# EAGLE board SparkFun_Qwiic_Micro_SAMD21E-Panel (EAGLE 9.4.2), part 1 of 5
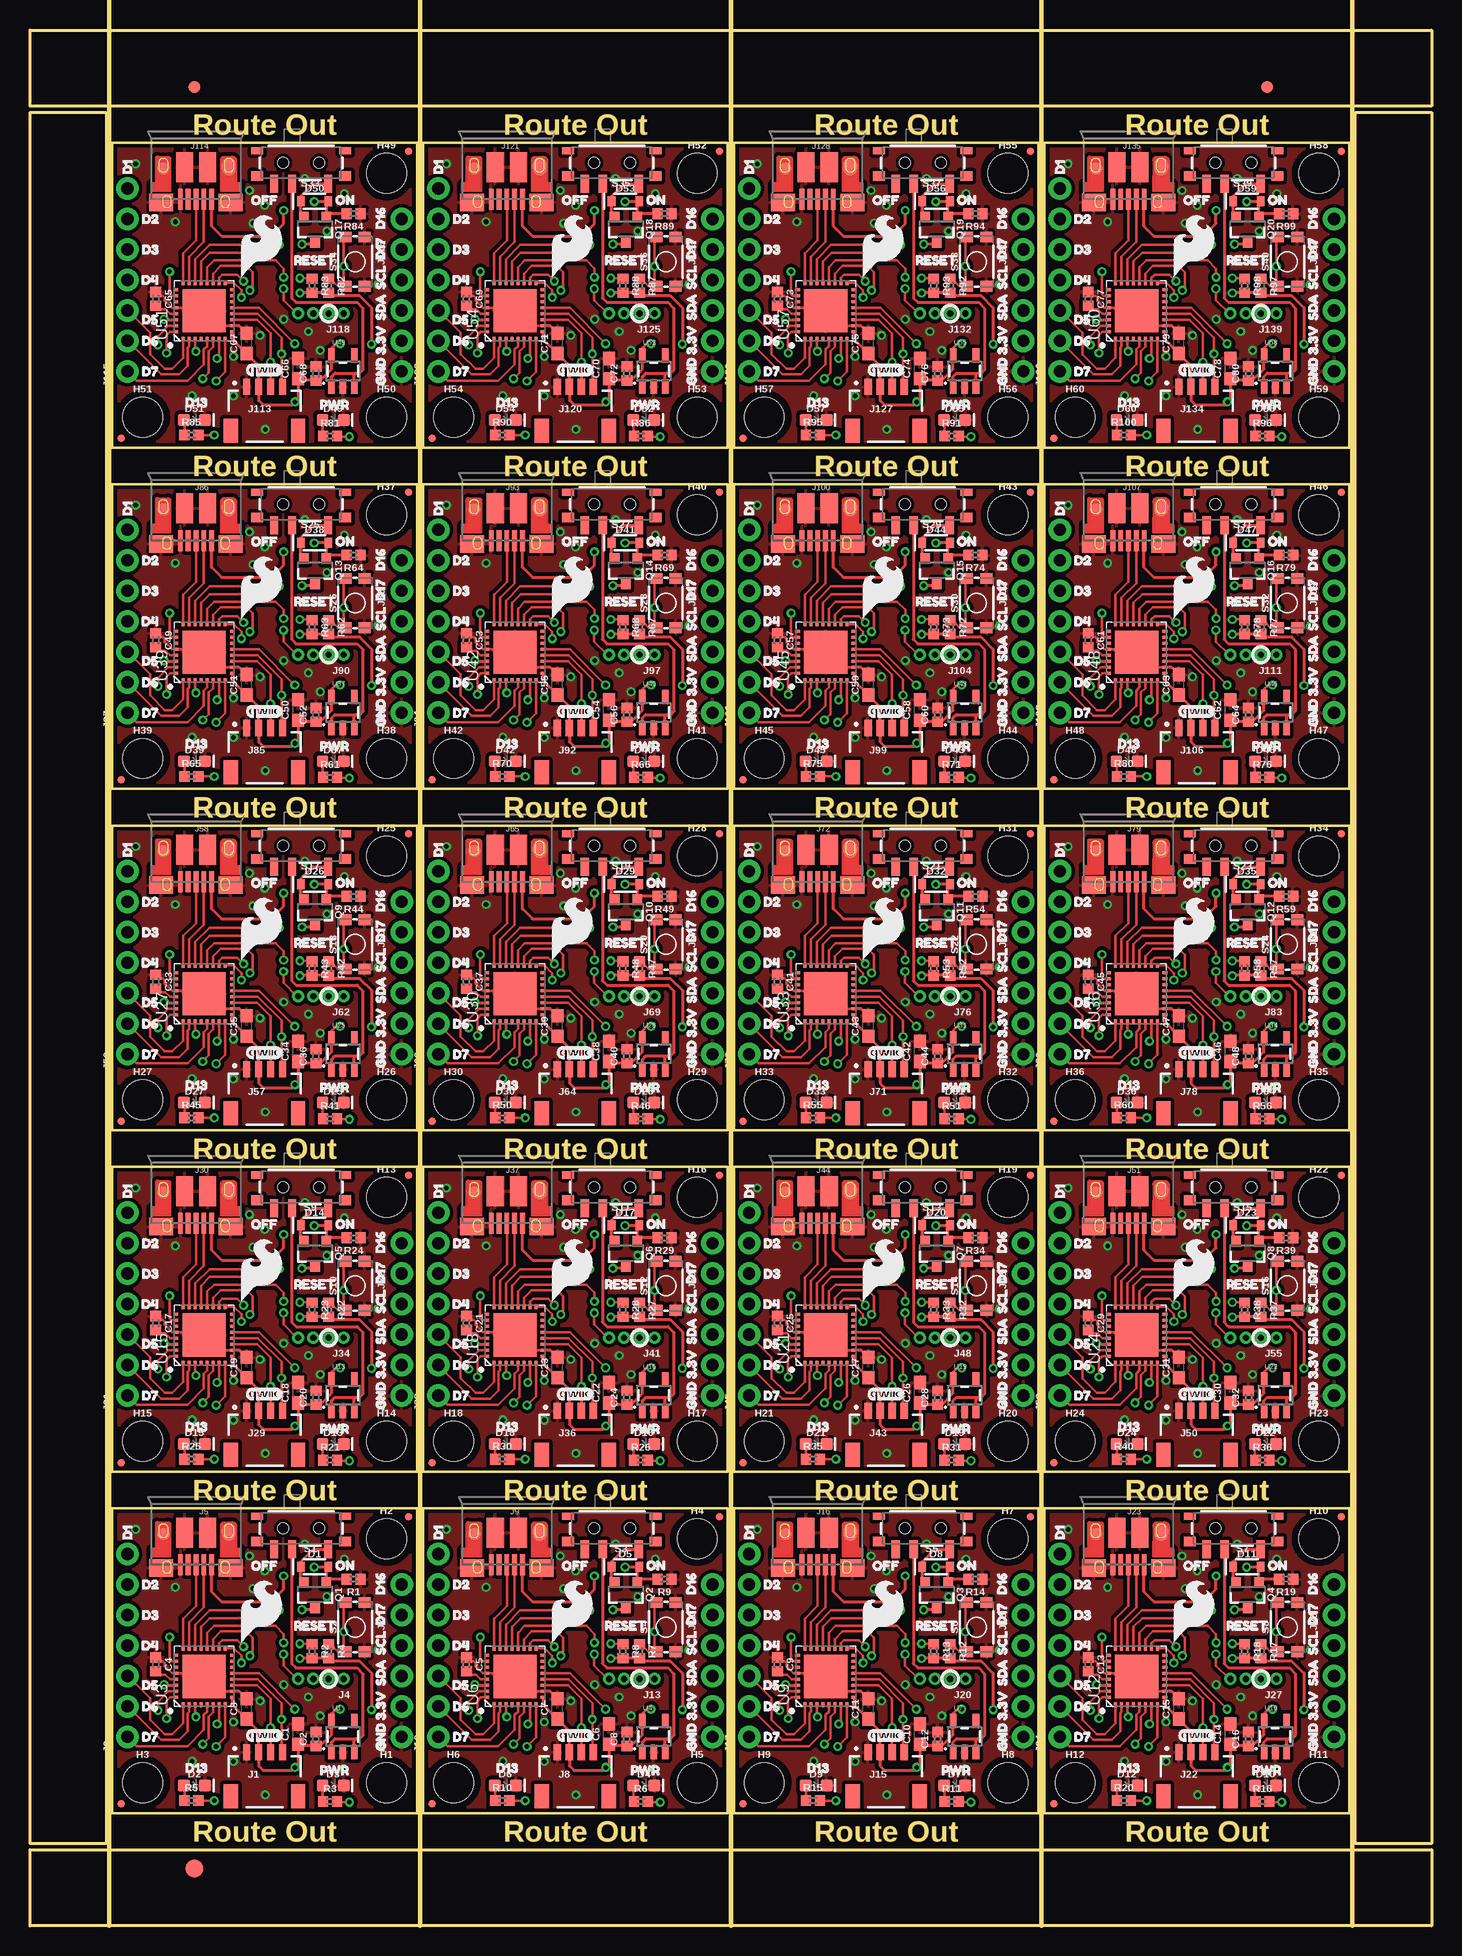
[diagram p0: board, top side]
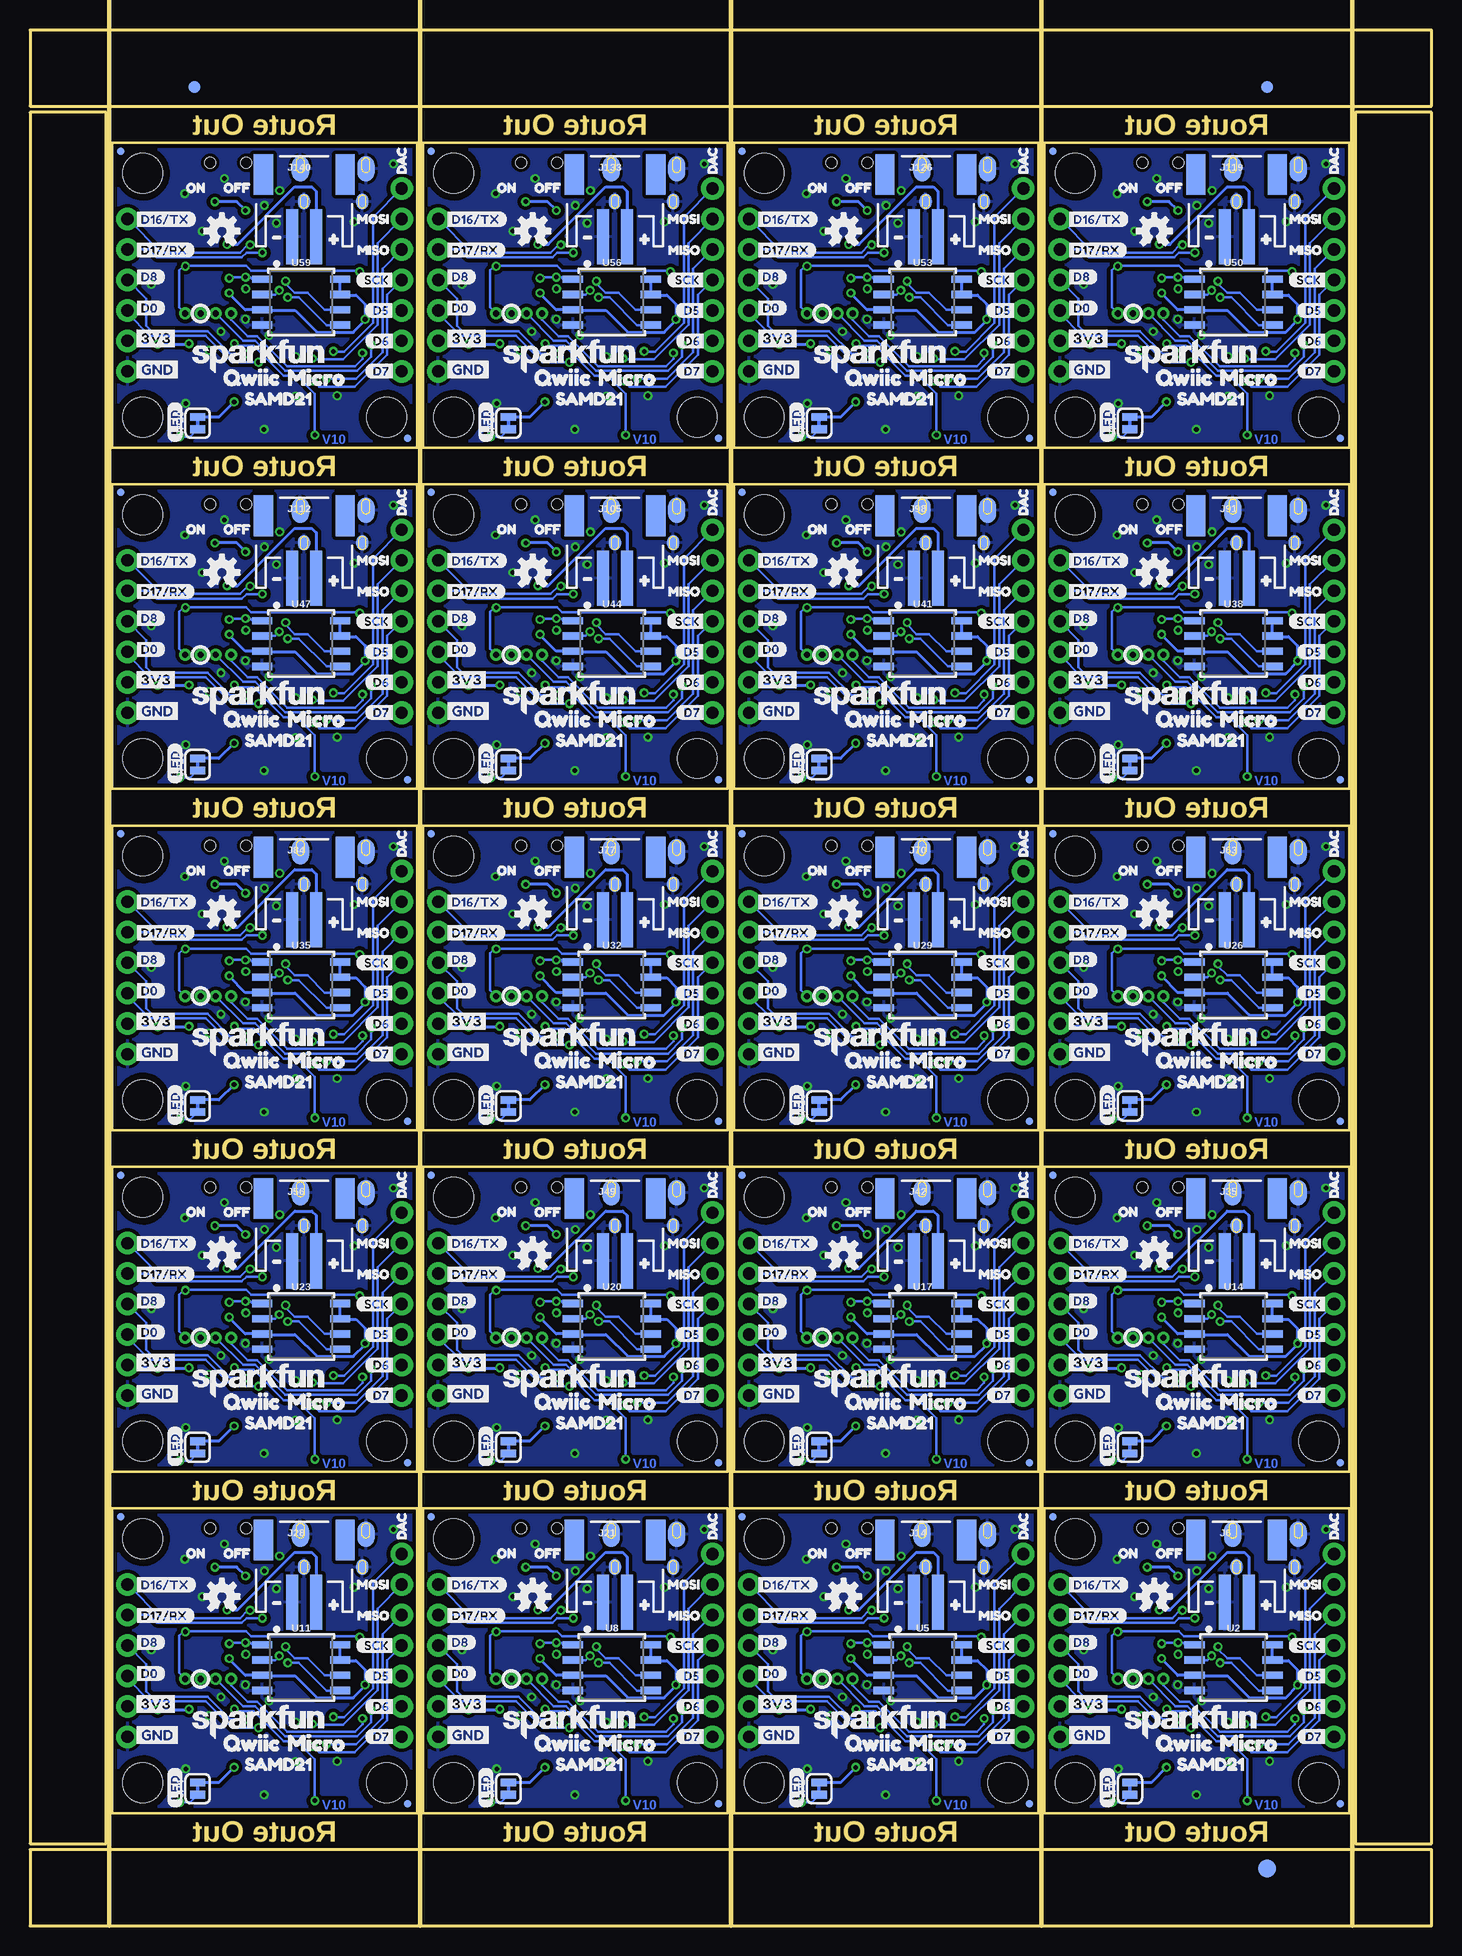
[diagram p1: board, bottom side, seen from below]

Size 116.84 x 157.99 mm. Coordinates in mm from the lower left corner, seen from the top.
Outline: 6.86,9.4 32.26,9.4 32.26,34.8 6.86,34.8 6.86,9.4
Outline: 32.77,9.4 58.17,9.4 58.17,34.8 32.77,34.8 32.77,9.4
Outline: 58.67,9.4 84.07,9.4 84.07,34.8 58.67,34.8 58.67,9.4
Outline: 84.58,9.4 109.98,9.4 109.98,34.8 84.58,34.8 84.58,9.4
Outline: 6.86,37.85 32.26,37.85 32.26,63.25 6.86,63.25 6.86,37.85
Outline: 32.77,37.85 58.17,37.85 58.17,63.25 32.77,63.25 32.77,37.85
Outline: 58.67,37.85 84.07,37.85 84.07,63.25 58.67,63.25 58.67,37.85
Outline: 84.58,37.85 109.98,37.85 109.98,63.25 84.58,63.25 84.58,37.85
Outline: 6.86,66.29 32.26,66.29 32.26,91.69 6.86,91.69 6.86,66.29
Outline: 32.77,66.29 58.17,66.29 58.17,91.69 32.77,91.69 32.77,66.29
Outline: 58.67,66.29 84.07,66.29 84.07,91.69 58.67,91.69 58.67,66.29
Outline: 84.58,66.29 109.98,66.29 109.98,91.69 84.58,91.69 84.58,66.29
Outline: 6.86,94.74 32.26,94.74 32.26,120.14 6.86,120.14 6.86,94.74
Outline: 32.77,94.74 58.17,94.74 58.17,120.14 32.77,120.14 32.77,94.74
Outline: 58.67,94.74 84.07,94.74 84.07,120.14 58.67,120.14 58.67,94.74
Outline: 84.58,94.74 109.98,94.74 109.98,120.14 84.58,120.14 84.58,94.74
Outline: 6.86,123.19 32.26,123.19 32.26,148.59 6.86,148.59 6.86,123.19
Outline: 32.77,123.19 58.17,123.19 58.17,148.59 32.77,148.59 32.77,123.19
Outline: 58.67,123.19 84.07,123.19 84.07,148.59 58.67,148.59 58.67,123.19
Outline: 84.58,123.19 109.98,123.19 109.98,148.59 84.58,148.59 84.58,123.19
Outline: 0,6.35 116.84,6.35 116.84,0 0,0 0,6.35
Outline: 110.49,151.13 116.84,151.13 116.84,6.86 110.49,6.86 110.49,151.13
Outline: 0,157.99 116.84,157.99 116.84,151.64 0,151.64 0,157.99
Outline: 0,151.13 6.35,151.13 6.35,6.86 0,6.86 0,151.13
Copper layers (1*16): Top 0.035mm / dielectric 1.5mm / Bottom 0.035mm
Design rules "SparkFun-2-layer-TIGHT": minimum track width 7mil, minimum drill 15mil, track to track 7mil, track to pad 7mil, pad to pad 7mil, via to via 7mil, smd to smd 7mil, copper to edge 7mil, drill to drill 7mil, minimum pad ring 7mil, minimum via ring 7mil, stop-mask expansion 4mil, vias tented up to drill 25mil, thermal gap 10mil
Milling: 5 lines

## Footprints (pad centres in the part's own frame; a part is rotated, then mirrored left to right if it is on the bottom)
0603 = smd 1.1 x 1: 1 -0.85,0; 2 0.85,0
0402 = smd 0.85 x 0.9: 1 -0.58,0; 2 0.58,0
SOD-323 = smd 0.63 x 0.83: A 1.15,0; C -1.15,0
LED-0603 = smd 1 x 1: A -0.877,0; C 0.877,0
FIDUCIAL-1X2 = smd 1 x 1: 1 0,0
FIDUCIAL-1.5X3 = smd 1.5 x 1.5: 1 0,0
FIDUCIAL-MICRO = smd 0.635 x 0.635: 1 0,0
STAND-OFF = hole 3.302: 0,0
JST04_1MM_RA = smd 0.6 x 1.35: 1 -1.5,0; 2 -0.5,0; 3 0.5,0; 4 1.5,0 | smd 1.2 x 2: NC1 2.8,-3.675; NC2 -2.8,-3.675
1X04_NO_SILK = drill 1.016 pad 1.88: 1 0,0; 2 2.54,0; 3 5.08,0; 4 7.62,0
1X07_NO_SILK = drill 1.016 pad 1.88: 1 0,0; 2 2.54,0; 3 5.08,0; 4 7.62,0; 5 10.16,0; 6 12.7,0; 7 15.24,0
1X04_1.27MM_NO_SILK = drill 0.508 pad 1: 1 0,0; 2 1.27,0; 3 2.54,0; 4 3.81,0
USB-MICROB-PTH-MILL = smd 0.4 x 1.75: D+ 0,0; D- -0.65,0; GND 1.3,0; ID 0.65,0; VBUS -1.3,0 | smd 2 x 1.46: SHIELD -2.9,0.275; SHIELD2 2.9,0.275 | smd 1.425 x 2.5: SHIELD3 -0.963,-2.675; SHIELD4 0.963,-2.675 | smd 1.4 x 2.1 bottom: SHIELD5 -2.731,-2.531; SHIELD7 2.729,-2.531 | smd 1 x 1: SHIELD6 2.7,-2.575 | smd 1.1 x 1.5: SHIELD8 -2.731,-2.731 | smd 1 x 1.3 bottom: SHIELD9 -2.43,0.195; SHIELD10 2.43,0.195
JST-2-SMD = smd 1 x 4.6: 1 -1,-3.7; 2 1,-3.7 | smd 1.6 x 3.4: NC1 -3.4,1.5; NC2 3.4,1.5
1X02_NO_SILK = drill 1.016 pad 1.88: 1 0,0; 2 2.54,0
SMT-JUMPER_2_NC_TRACE_SILK = smd 0.635 x 1.27: 1 -0.508,0; 2 0.508,0
SOT23-3 = smd 0.8 x 0.9: 1 -0.95,-1; 2 0.95,-1; 3 0,1.1
SWITCH_SPST_SMD_A = smd 0.7 x 1.5: 1 -2.25,-1.75; 2 -0.75,-1.75; 3 2.25,-1.75 | smd 1 x 0.6: GND1 -3.65,1; GND3 3.65,1 | smd 1 x 0.8: GND2 -3.65,-1.1; GND4 3.65,-1.1 | hole 0.9: -1.5,0; 1.5,0
TACTILE_SWITCH_SMD_4.6X2.8MM = smd 0.9 x 1: 1 -2.05,-0.8; 2 2.05,-0.8; 3 2.05,0.8; 4 -2.05,0.8
TP_15TH = drill 0.381 pad 0.61: P$1 0,0
SOT23-5 = smd 0.55 x 1.2: 1 -0.95,-1.3; 2 0,-1.3; 3 0.95,-1.3; 4 0.95,1.3; 5 -0.95,1.3
SOIC-8 = smd 0.61 x 1.702: 1 -1.905,-3.251; 2 -0.635,-3.251; 3 0.635,-3.251; 4 1.905,-3.251; 5 1.905,3.251; 6 0.635,3.251; 7 -0.635,3.251; 8 -1.905,3.251
QFN-32_SAMD = smd 0.25 x 0.4: GND 0.21,2.31; GNDANA -1.29,-2.39; PA08 -0.79,-2.39; PA09 -0.29,-2.39; PA10 0.21,-2.39; PA11 0.71,-2.39; PA14 1.21,-2.39; PA15 1.71,-2.39; PA27 1.71,2.31; PA28 0.71,2.31; PA30 -1.29,2.31; PA31 -1.79,2.31; RES 1.21,2.31; VDD -1.79,-2.39; VDDCORE -0.29,2.31; VDDIN -0.79,2.31 | smd 0.4 x 0.25: PA00 -2.39,1.71; PA01 -2.39,1.21; PA02 -2.39,0.71; PA03 -2.39,0.21; PA04 -2.39,-0.29; PA05 -2.39,-0.79; PA06 -2.39,-1.29; PA07 -2.39,-1.79; PA16 2.31,-1.79; PA17 2.31,-1.29; PA18 2.31,-0.79; PA19 2.31,-0.29; PA22 2.31,0.21; PA23 2.31,0.71; PA24 2.31,1.21; PA25 2.31,1.71 | smd 3.6 x 3.6: PAD -0.04,-0.04

## Placement (x,y rotation side)
C1  10uF  [0603]  22.35,15.98 90 top
C2  1.0uF  [0402]  23.85,15.57 90 top
C3  10uF  [0603]  18.06,18.08 90 top
C4  1.0uF  [0402]  10.49,21.79 270 top
C5  1.0uF  [0402]  36.39,21.79 270 top
C6  10uF  [0603]  48.26,15.98 90 top
C7  10uF  [0603]  43.97,18.08 90 top
C8  1.0uF  [0402]  49.76,15.57 90 top
C9  1.0uF  [0402]  62.3,21.79 270 top
C10  10uF  [0603]  74.17,15.98 90 top
C11  10uF  [0603]  69.88,18.08 90 top
C12  1.0uF  [0402]  75.67,15.57 90 top
C13  1.0uF  [0402]  88.21,21.79 270 top
C14  10uF  [0603]  100.08,15.98 90 top
C15  10uF  [0603]  95.78,18.08 90 top
C16  1.0uF  [0402]  101.57,15.57 90 top
C17  1.0uF  [0402]  10.49,50.23 270 top
C18  10uF  [0603]  22.35,44.42 90 top
C19  10uF  [0603]  18.06,46.53 90 top
C20  1.0uF  [0402]  23.85,44.02 90 top
C21  1.0uF  [0402]  36.39,50.23 270 top
C22  10uF  [0603]  48.26,44.42 90 top
C23  10uF  [0603]  43.97,46.53 90 top
C24  1.0uF  [0402]  49.76,44.02 90 top
C25  1.0uF  [0402]  62.3,50.23 270 top
C26  10uF  [0603]  74.17,44.42 90 top
C27  10uF  [0603]  69.88,46.53 90 top
C28  1.0uF  [0402]  75.67,44.02 90 top
C29  1.0uF  [0402]  88.21,50.23 270 top
C30  10uF  [0603]  100.08,44.42 90 top
C31  10uF  [0603]  95.78,46.53 90 top
C32  1.0uF  [0402]  101.57,44.02 90 top
C33  1.0uF  [0402]  10.49,78.68 270 top
C34  10uF  [0603]  22.35,72.87 90 top
C35  10uF  [0603]  18.06,74.98 90 top
C36  1.0uF  [0402]  23.85,72.47 90 top
C37  1.0uF  [0402]  36.39,78.68 270 top
C38  10uF  [0603]  48.26,72.87 90 top
C39  10uF  [0603]  43.97,74.98 90 top
C40  1.0uF  [0402]  49.76,72.47 90 top
C41  1.0uF  [0402]  62.3,78.68 270 top
C42  10uF  [0603]  74.17,72.87 90 top
C43  10uF  [0603]  69.88,74.98 90 top
C44  1.0uF  [0402]  75.67,72.47 90 top
C45  1.0uF  [0402]  88.21,78.68 270 top
C46  10uF  [0603]  100.08,72.87 90 top
C47  10uF  [0603]  95.78,74.98 90 top
C48  1.0uF  [0402]  101.57,72.47 90 top
C49  1.0uF  [0402]  10.49,107.13 270 top
C50  10uF  [0603]  22.35,101.32 90 top
C51  10uF  [0603]  18.06,103.43 90 top
C52  1.0uF  [0402]  23.85,100.91 90 top
C53  1.0uF  [0402]  36.39,107.13 270 top
C54  10uF  [0603]  48.26,101.32 90 top
C55  10uF  [0603]  43.97,103.43 90 top
C56  1.0uF  [0402]  49.76,100.91 90 top
C57  1.0uF  [0402]  62.3,107.13 270 top
C58  10uF  [0603]  74.17,101.32 90 top
C59  10uF  [0603]  69.88,103.43 90 top
C60  1.0uF  [0402]  75.67,100.91 90 top
C61  1.0uF  [0402]  88.21,107.13 270 top
C62  10uF  [0603]  100.08,101.32 90 top
C63  10uF  [0603]  95.78,103.43 90 top
C64  1.0uF  [0402]  101.57,100.91 90 top
C65  1.0uF  [0402]  10.49,135.58 270 top
C66  10uF  [0603]  22.35,129.77 90 top
C67  10uF  [0603]  18.06,131.88 90 top
C68  1.0uF  [0402]  23.85,129.36 90 top
C69  1.0uF  [0402]  36.39,135.58 270 top
C70  10uF  [0603]  48.26,129.77 90 top
C71  10uF  [0603]  43.97,131.88 90 top
C72  1.0uF  [0402]  49.76,129.36 90 top
C73  1.0uF  [0402]  62.3,135.58 270 top
C74  10uF  [0603]  74.17,129.77 90 top
C75  10uF  [0603]  69.88,131.88 90 top
C76  1.0uF  [0402]  75.67,129.36 90 top
C77  1.0uF  [0402]  88.21,135.58 270 top
C78  10uF  [0603]  100.08,129.77 90 top
C79  10uF  [0603]  95.78,131.88 90 top
C80  1.0uF  [0402]  101.57,129.36 90 top
D1  1A/23V/620mV  [SOD-323]  23.72,29.92 0 top
D2  BLUE  [LED-0603]  13.72,11.71 0 top
D3  RED  [LED-0603]  25.27,11.71 0 top
D4  RED  [LED-0603]  51.18,11.71 0 top
D5  1A/23V/620mV  [SOD-323]  49.63,29.92 0 top
D6  BLUE  [LED-0603]  39.62,11.71 0 top
D7  RED  [LED-0603]  77.09,11.71 0 top
D8  1A/23V/620mV  [SOD-323]  75.54,29.92 0 top
D9  BLUE  [LED-0603]  65.53,11.71 0 top
D10  RED  [LED-0603]  103,11.71 0 top
D11  1A/23V/620mV  [SOD-323]  101.45,29.92 0 top
D12  BLUE  [LED-0603]  91.44,11.71 0 top
D13  RED  [LED-0603]  25.27,40.16 0 top
D14  1A/23V/620mV  [SOD-323]  23.72,58.37 0 top
D15  BLUE  [LED-0603]  13.72,40.16 0 top
D16  RED  [LED-0603]  51.18,40.16 0 top
D17  1A/23V/620mV  [SOD-323]  49.63,58.37 0 top
D18  BLUE  [LED-0603]  39.62,40.16 0 top
D19  RED  [LED-0603]  77.09,40.16 0 top
D20  1A/23V/620mV  [SOD-323]  75.54,58.37 0 top
D21  BLUE  [LED-0603]  65.53,40.16 0 top
D22  RED  [LED-0603]  103,40.16 0 top
D23  1A/23V/620mV  [SOD-323]  101.45,58.37 0 top
D24  BLUE  [LED-0603]  91.44,40.16 0 top
D25  RED  [LED-0603]  25.27,68.61 0 top
D26  1A/23V/620mV  [SOD-323]  23.72,86.82 0 top
D27  BLUE  [LED-0603]  13.72,68.61 0 top
D28  RED  [LED-0603]  51.18,68.61 0 top
D29  1A/23V/620mV  [SOD-323]  49.63,86.82 0 top
D30  BLUE  [LED-0603]  39.62,68.61 0 top
D31  RED  [LED-0603]  77.09,68.61 0 top
D32  1A/23V/620mV  [SOD-323]  75.54,86.82 0 top
D33  BLUE  [LED-0603]  65.53,68.61 0 top
D34  RED  [LED-0603]  103,68.61 0 top
D35  1A/23V/620mV  [SOD-323]  101.45,86.82 0 top
D36  BLUE  [LED-0603]  91.44,68.61 0 top
D37  RED  [LED-0603]  25.27,97.05 0 top
D38  1A/23V/620mV  [SOD-323]  23.72,115.27 0 top
D39  BLUE  [LED-0603]  13.72,97.05 0 top
D40  RED  [LED-0603]  51.18,97.05 0 top
D41  1A/23V/620mV  [SOD-323]  49.63,115.27 0 top
D42  BLUE  [LED-0603]  39.62,97.05 0 top
D43  RED  [LED-0603]  77.09,97.05 0 top
D44  1A/23V/620mV  [SOD-323]  75.54,115.27 0 top
D45  BLUE  [LED-0603]  65.53,97.05 0 top
D46  RED  [LED-0603]  103,97.05 0 top
D47  1A/23V/620mV  [SOD-323]  101.45,115.27 0 top
D48  BLUE  [LED-0603]  91.44,97.05 0 top
D49  RED  [LED-0603]  25.27,125.5 0 top
D50  1A/23V/620mV  [SOD-323]  23.72,143.71 0 top
D51  BLUE  [LED-0603]  13.72,125.5 0 top
D52  RED  [LED-0603]  51.18,125.5 0 top
D53  1A/23V/620mV  [SOD-323]  49.63,143.71 0 top
D54  BLUE  [LED-0603]  39.62,125.5 0 top
D55  RED  [LED-0603]  77.09,125.5 0 top
D56  1A/23V/620mV  [SOD-323]  75.54,143.71 0 top
D57  BLUE  [LED-0603]  65.53,125.5 0 top
D58  RED  [LED-0603]  103,125.5 0 top
D59  1A/23V/620mV  [SOD-323]  101.45,143.71 0 top
D60  BLUE  [LED-0603]  91.44,125.5 0 top
E$1  [FIDUCIAL-1X2]  13.72,153.23 0 top
E$2  [FIDUCIAL-1X2]  13.72,153.23 0 bottom
E$3  [FIDUCIAL-1X2]  103.12,153.23 0 top
E$4  [FIDUCIAL-1X2]  103.12,153.23 0 bottom
E$5  [FIDUCIAL-1.5X3]  13.72,4.76 0 top
E$6  [FIDUCIAL-1.5X3]  13.72,4.76 0 bottom
FD1  FIDUCIALUFIDUCIAL  [FIDUCIAL-MICRO]  31.57,34.11 0 bottom
FD2  FIDUCIALUFIDUCIAL  [FIDUCIAL-MICRO]  7.62,10.16 0 top
FD3  FIDUCIALUFIDUCIAL  [FIDUCIAL-MICRO]  31.57,34.11 0 top
FD4  FIDUCIALUFIDUCIAL  [FIDUCIAL-MICRO]  7.62,10.16 0 bottom
FD5  FIDUCIALUFIDUCIAL  [FIDUCIAL-MICRO]  33.53,10.16 0 top
FD6  FIDUCIALUFIDUCIAL  [FIDUCIAL-MICRO]  33.53,10.16 0 bottom
FD7  FIDUCIALUFIDUCIAL  [FIDUCIAL-MICRO]  57.48,34.11 0 bottom
FD8  FIDUCIALUFIDUCIAL  [FIDUCIAL-MICRO]  57.48,34.11 0 top
FD9  FIDUCIALUFIDUCIAL  [FIDUCIAL-MICRO]  59.44,10.16 0 top
FD10  FIDUCIALUFIDUCIAL  [FIDUCIAL-MICRO]  59.44,10.16 0 bottom
FD11  FIDUCIALUFIDUCIAL  [FIDUCIAL-MICRO]  83.39,34.11 0 bottom
FD12  FIDUCIALUFIDUCIAL  [FIDUCIAL-MICRO]  83.39,34.11 0 top
FD13  FIDUCIALUFIDUCIAL  [FIDUCIAL-MICRO]  85.34,10.16 0 top
FD14  FIDUCIALUFIDUCIAL  [FIDUCIAL-MICRO]  85.34,10.16 0 bottom
FD15  FIDUCIALUFIDUCIAL  [FIDUCIAL-MICRO]  109.3,34.11 0 bottom
FD16  FIDUCIALUFIDUCIAL  [FIDUCIAL-MICRO]  109.3,34.11 0 top
FD17  FIDUCIALUFIDUCIAL  [FIDUCIAL-MICRO]  7.62,38.61 0 top
FD18  FIDUCIALUFIDUCIAL  [FIDUCIAL-MICRO]  7.62,38.61 0 bottom
FD19  FIDUCIALUFIDUCIAL  [FIDUCIAL-MICRO]  31.57,62.56 0 bottom
FD20  FIDUCIALUFIDUCIAL  [FIDUCIAL-MICRO]  31.57,62.56 0 top
FD21  FIDUCIALUFIDUCIAL  [FIDUCIAL-MICRO]  33.53,38.61 0 top
FD22  FIDUCIALUFIDUCIAL  [FIDUCIAL-MICRO]  33.53,38.61 0 bottom
FD23  FIDUCIALUFIDUCIAL  [FIDUCIAL-MICRO]  57.48,62.56 0 bottom
FD24  FIDUCIALUFIDUCIAL  [FIDUCIAL-MICRO]  57.48,62.56 0 top
FD25  FIDUCIALUFIDUCIAL  [FIDUCIAL-MICRO]  59.44,38.61 0 top
FD26  FIDUCIALUFIDUCIAL  [FIDUCIAL-MICRO]  59.44,38.61 0 bottom
FD27  FIDUCIALUFIDUCIAL  [FIDUCIAL-MICRO]  83.39,62.56 0 bottom
FD28  FIDUCIALUFIDUCIAL  [FIDUCIAL-MICRO]  83.39,62.56 0 top
FD29  FIDUCIALUFIDUCIAL  [FIDUCIAL-MICRO]  85.34,38.61 0 top
FD30  FIDUCIALUFIDUCIAL  [FIDUCIAL-MICRO]  85.34,38.61 0 bottom
FD31  FIDUCIALUFIDUCIAL  [FIDUCIAL-MICRO]  109.3,62.56 0 bottom
FD32  FIDUCIALUFIDUCIAL  [FIDUCIAL-MICRO]  109.3,62.56 0 top
FD33  FIDUCIALUFIDUCIAL  [FIDUCIAL-MICRO]  7.62,67.06 0 top
FD34  FIDUCIALUFIDUCIAL  [FIDUCIAL-MICRO]  7.62,67.06 0 bottom
FD35  FIDUCIALUFIDUCIAL  [FIDUCIAL-MICRO]  31.57,91.01 0 bottom
FD36  FIDUCIALUFIDUCIAL  [FIDUCIAL-MICRO]  31.57,91.01 0 top
FD37  FIDUCIALUFIDUCIAL  [FIDUCIAL-MICRO]  33.53,67.06 0 top
FD38  FIDUCIALUFIDUCIAL  [FIDUCIAL-MICRO]  33.53,67.06 0 bottom
FD39  FIDUCIALUFIDUCIAL  [FIDUCIAL-MICRO]  57.48,91.01 0 bottom
FD40  FIDUCIALUFIDUCIAL  [FIDUCIAL-MICRO]  57.48,91.01 0 top
FD41  FIDUCIALUFIDUCIAL  [FIDUCIAL-MICRO]  59.44,67.06 0 top
FD42  FIDUCIALUFIDUCIAL  [FIDUCIAL-MICRO]  59.44,67.06 0 bottom
FD43  FIDUCIALUFIDUCIAL  [FIDUCIAL-MICRO]  83.39,91.01 0 bottom
FD44  FIDUCIALUFIDUCIAL  [FIDUCIAL-MICRO]  83.39,91.01 0 top
FD45  FIDUCIALUFIDUCIAL  [FIDUCIAL-MICRO]  85.34,67.06 0 top
FD46  FIDUCIALUFIDUCIAL  [FIDUCIAL-MICRO]  85.34,67.06 0 bottom
FD47  FIDUCIALUFIDUCIAL  [FIDUCIAL-MICRO]  109.3,91.01 0 bottom
FD48  FIDUCIALUFIDUCIAL  [FIDUCIAL-MICRO]  109.3,91.01 0 top
FD49  FIDUCIALUFIDUCIAL  [FIDUCIAL-MICRO]  7.62,95.5 0 top
FD50  FIDUCIALUFIDUCIAL  [FIDUCIAL-MICRO]  7.62,95.5 0 bottom
FD51  FIDUCIALUFIDUCIAL  [FIDUCIAL-MICRO]  31.57,119.46 0 bottom
FD52  FIDUCIALUFIDUCIAL  [FIDUCIAL-MICRO]  31.57,119.46 0 top
FD53  FIDUCIALUFIDUCIAL  [FIDUCIAL-MICRO]  33.53,95.5 0 top
FD54  FIDUCIALUFIDUCIAL  [FIDUCIAL-MICRO]  33.53,95.5 0 bottom
FD55  FIDUCIALUFIDUCIAL  [FIDUCIAL-MICRO]  57.48,119.46 0 bottom
FD56  FIDUCIALUFIDUCIAL  [FIDUCIAL-MICRO]  57.48,119.46 0 top
FD57  FIDUCIALUFIDUCIAL  [FIDUCIAL-MICRO]  59.44,95.5 0 top
FD58  FIDUCIALUFIDUCIAL  [FIDUCIAL-MICRO]  59.44,95.5 0 bottom
FD59  FIDUCIALUFIDUCIAL  [FIDUCIAL-MICRO]  83.39,119.46 0 bottom
FD60  FIDUCIALUFIDUCIAL  [FIDUCIAL-MICRO]  83.39,119.46 0 top
FD61  FIDUCIALUFIDUCIAL  [FIDUCIAL-MICRO]  85.34,95.5 0 top
FD62  FIDUCIALUFIDUCIAL  [FIDUCIAL-MICRO]  85.34,95.5 0 bottom
FD63  FIDUCIALUFIDUCIAL  [FIDUCIAL-MICRO]  109.3,119.46 0 bottom
FD64  FIDUCIALUFIDUCIAL  [FIDUCIAL-MICRO]  109.3,119.46 0 top
FD65  FIDUCIALUFIDUCIAL  [FIDUCIAL-MICRO]  7.62,123.95 0 top
FD66  FIDUCIALUFIDUCIAL  [FIDUCIAL-MICRO]  7.62,123.95 0 bottom
FD67  FIDUCIALUFIDUCIAL  [FIDUCIAL-MICRO]  31.57,147.9 0 bottom
FD68  FIDUCIALUFIDUCIAL  [FIDUCIAL-MICRO]  31.57,147.9 0 top
FD69  FIDUCIALUFIDUCIAL  [FIDUCIAL-MICRO]  33.53,123.95 0 top
FD70  FIDUCIALUFIDUCIAL  [FIDUCIAL-MICRO]  33.53,123.95 0 bottom
FD71  FIDUCIALUFIDUCIAL  [FIDUCIAL-MICRO]  57.48,147.9 0 bottom
FD72  FIDUCIALUFIDUCIAL  [FIDUCIAL-MICRO]  57.48,147.9 0 top
FD73  FIDUCIALUFIDUCIAL  [FIDUCIAL-MICRO]  59.44,123.95 0 top
FD74  FIDUCIALUFIDUCIAL  [FIDUCIAL-MICRO]  59.44,123.95 0 bottom
FD75  FIDUCIALUFIDUCIAL  [FIDUCIAL-MICRO]  83.39,147.9 0 bottom
FD76  FIDUCIALUFIDUCIAL  [FIDUCIAL-MICRO]  83.39,147.9 0 top
FD77  FIDUCIALUFIDUCIAL  [FIDUCIAL-MICRO]  85.34,123.95 0 top
FD78  FIDUCIALUFIDUCIAL  [FIDUCIAL-MICRO]  85.34,123.95 0 bottom
FD79  FIDUCIALUFIDUCIAL  [FIDUCIAL-MICRO]  109.3,147.9 0 bottom
FD80  FIDUCIALUFIDUCIAL  [FIDUCIAL-MICRO]  109.3,147.9 0 top
H1  STAND-OFF  [STAND-OFF]  29.72,11.94 0 top
H2  STAND-OFF  [STAND-OFF]  29.72,32.26 0 top
H3  STAND-OFF  [STAND-OFF]  9.4,11.94 0 top
H4  STAND-OFF  [STAND-OFF]  55.63,32.26 0 top
H5  STAND-OFF  [STAND-OFF]  55.63,11.94 0 top
H6  STAND-OFF  [STAND-OFF]  35.31,11.94 0 top
H7  STAND-OFF  [STAND-OFF]  81.53,32.26 0 top
H8  STAND-OFF  [STAND-OFF]  81.53,11.94 0 top
H9  STAND-OFF  [STAND-OFF]  61.21,11.94 0 top
H10  STAND-OFF  [STAND-OFF]  107.44,32.26 0 top
H11  STAND-OFF  [STAND-OFF]  107.44,11.94 0 top
H12  STAND-OFF  [STAND-OFF]  87.12,11.94 0 top
H13  STAND-OFF  [STAND-OFF]  29.72,60.71 0 top
H14  STAND-OFF  [STAND-OFF]  29.72,40.39 0 top
H15  STAND-OFF  [STAND-OFF]  9.4,40.39 0 top
H16  STAND-OFF  [STAND-OFF]  55.63,60.71 0 top
H17  STAND-OFF  [STAND-OFF]  55.63,40.39 0 top
H18  STAND-OFF  [STAND-OFF]  35.31,40.39 0 top
H19  STAND-OFF  [STAND-OFF]  81.53,60.71 0 top
H20  STAND-OFF  [STAND-OFF]  81.53,40.39 0 top
H21  STAND-OFF  [STAND-OFF]  61.21,40.39 0 top
H22  STAND-OFF  [STAND-OFF]  107.44,60.71 0 top
H23  STAND-OFF  [STAND-OFF]  107.44,40.39 0 top
H24  STAND-OFF  [STAND-OFF]  87.12,40.39 0 top
H25  STAND-OFF  [STAND-OFF]  29.72,89.15 0 top
H26  STAND-OFF  [STAND-OFF]  29.72,68.83 0 top
H27  STAND-OFF  [STAND-OFF]  9.4,68.83 0 top
H28  STAND-OFF  [STAND-OFF]  55.63,89.15 0 top
H29  STAND-OFF  [STAND-OFF]  55.63,68.83 0 top
H30  STAND-OFF  [STAND-OFF]  35.31,68.83 0 top
H31  STAND-OFF  [STAND-OFF]  81.53,89.15 0 top
H32  STAND-OFF  [STAND-OFF]  81.53,68.83 0 top
H33  STAND-OFF  [STAND-OFF]  61.21,68.83 0 top
H34  STAND-OFF  [STAND-OFF]  107.44,89.15 0 top
H35  STAND-OFF  [STAND-OFF]  107.44,68.83 0 top
H36  STAND-OFF  [STAND-OFF]  87.12,68.83 0 top
H37  STAND-OFF  [STAND-OFF]  29.72,117.6 0 top
H38  STAND-OFF  [STAND-OFF]  29.72,97.28 0 top
H39  STAND-OFF  [STAND-OFF]  9.4,97.28 0 top
H40  STAND-OFF  [STAND-OFF]  55.63,117.6 0 top
H41  STAND-OFF  [STAND-OFF]  55.63,97.28 0 top
H42  STAND-OFF  [STAND-OFF]  35.31,97.28 0 top
H43  STAND-OFF  [STAND-OFF]  81.53,117.6 0 top
H44  STAND-OFF  [STAND-OFF]  81.53,97.28 0 top
H45  STAND-OFF  [STAND-OFF]  61.21,97.28 0 top
H46  STAND-OFF  [STAND-OFF]  107.44,117.6 0 top
H47  STAND-OFF  [STAND-OFF]  107.44,97.28 0 top
H48  STAND-OFF  [STAND-OFF]  87.12,97.28 0 top
H49  STAND-OFF  [STAND-OFF]  29.72,146.05 0 top
H50  STAND-OFF  [STAND-OFF]  29.72,125.73 0 top
H51  STAND-OFF  [STAND-OFF]  9.4,125.73 0 top
H52  STAND-OFF  [STAND-OFF]  55.63,146.05 0 top
H53  STAND-OFF  [STAND-OFF]  55.63,125.73 0 top
H54  STAND-OFF  [STAND-OFF]  35.31,125.73 0 top
H55  STAND-OFF  [STAND-OFF]  81.53,146.05 0 top
H56  STAND-OFF  [STAND-OFF]  81.53,125.73 0 top
H57  STAND-OFF  [STAND-OFF]  61.21,125.73 0 top
H58  STAND-OFF  [STAND-OFF]  107.44,146.05 0 top
H59  STAND-OFF  [STAND-OFF]  107.44,125.73 0 top
H60  STAND-OFF  [STAND-OFF]  87.12,125.73 0 top
J1  [JST04_1MM_RA]  19.56,14.48 0 top
J2  [1X04_NO_SILK]  30.99,15.75 90 top
J3  [1X07_NO_SILK]  8.13,15.75 90 top
J4  [1X04_1.27MM_NO_SILK]  26.16,20.57 180 top
J5  [USB-MICROB-PTH-MILL]  13.84,30.1 180 top
J6  [JST-2-SMD]  16.26,30.66 0 bottom
J7  [1X02_NO_SILK]  30.99,25.91 90 top
J8  [JST04_1MM_RA]  45.47,14.48 0 top
J9  [USB-MICROB-PTH-MILL]  39.75,30.1 180 top
J10  [1X07_NO_SILK]  34.04,15.75 90 top
J11  [1X02_NO_SILK]  56.9,25.91 90 top
J12  [1X04_NO_SILK]  56.9,15.75 90 top
J13  [1X04_1.27MM_NO_SILK]  52.07,20.57 180 top
J14  [JST-2-SMD]  42.16,30.66 0 bottom
J15  [JST04_1MM_RA]  71.37,14.48 0 top
J16  [USB-MICROB-PTH-MILL]  65.66,30.1 180 top
J17  [1X07_NO_SILK]  59.94,15.75 90 top
J18  [1X02_NO_SILK]  82.8,25.91 90 top
J19  [1X04_NO_SILK]  82.8,15.75 90 top
J20  [1X04_1.27MM_NO_SILK]  77.98,20.57 180 top
J21  [JST-2-SMD]  68.07,30.66 0 bottom
J22  [JST04_1MM_RA]  97.28,14.48 0 top
J23  [USB-MICROB-PTH-MILL]  91.57,30.1 180 top
J24  [1X07_NO_SILK]  85.85,15.75 90 top
J25  [1X02_NO_SILK]  108.71,25.91 90 top
J26  [1X04_NO_SILK]  108.71,15.75 90 top
J27  [1X04_1.27MM_NO_SILK]  103.89,20.57 180 top
J28  [JST-2-SMD]  93.98,30.66 0 bottom
J29  [JST04_1MM_RA]  19.56,42.93 0 top
J30  [USB-MICROB-PTH-MILL]  13.84,58.55 180 top
J31  [1X07_NO_SILK]  8.13,44.2 90 top
J32  [1X02_NO_SILK]  30.99,54.36 90 top
J33  [1X04_NO_SILK]  30.99,44.2 90 top
J34  [1X04_1.27MM_NO_SILK]  26.16,49.02 180 top
J35  [JST-2-SMD]  16.26,59.11 0 bottom
J36  [JST04_1MM_RA]  45.47,42.93 0 top
J37  [USB-MICROB-PTH-MILL]  39.75,58.55 180 top
J38  [1X07_NO_SILK]  34.04,44.2 90 top
J39  [1X02_NO_SILK]  56.9,54.36 90 top
J40  [1X04_NO_SILK]  56.9,44.2 90 top
J41  [1X04_1.27MM_NO_SILK]  52.07,49.02 180 top
J42  [JST-2-SMD]  42.16,59.11 0 bottom
J43  [JST04_1MM_RA]  71.37,42.93 0 top
J44  [USB-MICROB-PTH-MILL]  65.66,58.55 180 top
J45  [1X07_NO_SILK]  59.94,44.2 90 top
J46  [1X02_NO_SILK]  82.8,54.36 90 top
J47  [1X04_NO_SILK]  82.8,44.2 90 top
J48  [1X04_1.27MM_NO_SILK]  77.98,49.02 180 top
J49  [JST-2-SMD]  68.07,59.11 0 bottom
J50  [JST04_1MM_RA]  97.28,42.93 0 top
J51  [USB-MICROB-PTH-MILL]  91.57,58.55 180 top
J52  [1X07_NO_SILK]  85.85,44.2 90 top
J53  [1X02_NO_SILK]  108.71,54.36 90 top
J54  [1X04_NO_SILK]  108.71,44.2 90 top
J55  [1X04_1.27MM_NO_SILK]  103.89,49.02 180 top
J56  [JST-2-SMD]  93.98,59.11 0 bottom
J57  [JST04_1MM_RA]  19.56,71.37 0 top
J58  [USB-MICROB-PTH-MILL]  13.84,86.99 180 top
J59  [1X07_NO_SILK]  8.13,72.64 90 top
J60  [1X02_NO_SILK]  30.99,82.8 90 top
J61  [1X04_NO_SILK]  30.99,72.64 90 top
J62  [1X04_1.27MM_NO_SILK]  26.16,77.47 180 top
J63  [JST-2-SMD]  16.26,87.55 0 bottom
J64  [JST04_1MM_RA]  45.47,71.37 0 top
J65  [USB-MICROB-PTH-MILL]  39.75,86.99 180 top
J66  [1X07_NO_SILK]  34.04,72.64 90 top
J67  [1X02_NO_SILK]  56.9,82.8 90 top
J68  [1X04_NO_SILK]  56.9,72.64 90 top
J69  [1X04_1.27MM_NO_SILK]  52.07,77.47 180 top
J70  [JST-2-SMD]  42.16,87.55 0 bottom
J71  [JST04_1MM_RA]  71.37,71.37 0 top
J72  [USB-MICROB-PTH-MILL]  65.66,86.99 180 top
J73  [1X07_NO_SILK]  59.94,72.64 90 top
J74  [1X02_NO_SILK]  82.8,82.8 90 top
J75  [1X04_NO_SILK]  82.8,72.64 90 top
J76  [1X04_1.27MM_NO_SILK]  77.98,77.47 180 top
J77  [JST-2-SMD]  68.07,87.55 0 bottom
J78  [JST04_1MM_RA]  97.28,71.37 0 top
J79  [USB-MICROB-PTH-MILL]  91.57,86.99 180 top
J80  [1X07_NO_SILK]  85.85,72.64 90 top
J81  [1X02_NO_SILK]  108.71,82.8 90 top
J82  [1X04_NO_SILK]  108.71,72.64 90 top
J83  [1X04_1.27MM_NO_SILK]  103.89,77.47 180 top
J84  [JST-2-SMD]  93.98,87.55 0 bottom
J85  [JST04_1MM_RA]  19.56,99.82 0 top
J86  [USB-MICROB-PTH-MILL]  13.84,115.44 180 top
J87  [1X07_NO_SILK]  8.13,101.09 90 top
J88  [1X02_NO_SILK]  30.99,111.25 90 top
J89  [1X04_NO_SILK]  30.99,101.09 90 top
J90  [1X04_1.27MM_NO_SILK]  26.16,105.92 180 top
J91  [JST-2-SMD]  16.26,116 0 bottom
J92  [JST04_1MM_RA]  45.47,99.82 0 top
J93  [USB-MICROB-PTH-MILL]  39.75,115.44 180 top
J94  [1X07_NO_SILK]  34.04,101.09 90 top
J95  [1X02_NO_SILK]  56.9,111.25 90 top
J96  [1X04_NO_SILK]  56.9,101.09 90 top
J97  [1X04_1.27MM_NO_SILK]  52.07,105.92 180 top
J98  [JST-2-SMD]  42.16,116 0 bottom
J99  [JST04_1MM_RA]  71.37,99.82 0 top
J100  [USB-MICROB-PTH-MILL]  65.66,115.44 180 top
J101  [1X07_NO_SILK]  59.94,101.09 90 top
J102  [1X02_NO_SILK]  82.8,111.25 90 top
J103  [1X04_NO_SILK]  82.8,101.09 90 top
J104  [1X04_1.27MM_NO_SILK]  77.98,105.92 180 top
J105  [JST-2-SMD]  68.07,116 0 bottom
J106  [JST04_1MM_RA]  97.28,99.82 0 top
J107  [USB-MICROB-PTH-MILL]  91.57,115.44 180 top
J108  [1X07_NO_SILK]  85.85,101.09 90 top
J109  [1X02_NO_SILK]  108.71,111.25 90 top
J110  [1X04_NO_SILK]  108.71,101.09 90 top
J111  [1X04_1.27MM_NO_SILK]  103.89,105.92 180 top
J112  [JST-2-SMD]  93.98,116 0 bottom
J113  [JST04_1MM_RA]  19.56,128.27 0 top
J114  [USB-MICROB-PTH-MILL]  13.84,143.89 180 top
J115  [1X07_NO_SILK]  8.13,129.54 90 top
J116  [1X02_NO_SILK]  30.99,139.7 90 top
J117  [1X04_NO_SILK]  30.99,129.54 90 top
J118  [1X04_1.27MM_NO_SILK]  26.16,134.37 180 top
J119  [JST-2-SMD]  16.26,144.45 0 bottom
J120  [JST04_1MM_RA]  45.47,128.27 0 top
J121  [USB-MICROB-PTH-MILL]  39.75,143.89 180 top
J122  [1X07_NO_SILK]  34.04,129.54 90 top
J123  [1X02_NO_SILK]  56.9,139.7 90 top
J124  [1X04_NO_SILK]  56.9,129.54 90 top
J125  [1X04_1.27MM_NO_SILK]  52.07,134.37 180 top
J126  [JST-2-SMD]  42.16,144.45 0 bottom
J127  [JST04_1MM_RA]  71.37,128.27 0 top
J128  [USB-MICROB-PTH-MILL]  65.66,143.89 180 top
J129  [1X07_NO_SILK]  59.94,129.54 90 top
J130  [1X02_NO_SILK]  82.8,139.7 90 top
J131  [1X04_NO_SILK]  82.8,129.54 90 top
J132  [1X04_1.27MM_NO_SILK]  77.98,134.37 180 top
J133  [JST-2-SMD]  68.07,144.45 0 bottom
J134  [JST04_1MM_RA]  97.28,128.27 0 top
J135  [USB-MICROB-PTH-MILL]  91.57,143.89 180 top
J136  [1X07_NO_SILK]  85.85,129.54 90 top
J137  [1X02_NO_SILK]  108.71,139.7 90 top
J138  [1X04_NO_SILK]  108.71,129.54 90 top
J139  [1X04_1.27MM_NO_SILK]  103.89,134.37 180 top
J140  [JST-2-SMD]  93.98,144.45 0 bottom
JP1  LED  [SMT-JUMPER_2_NC_TRACE_SILK]  25.15,11.43 90 bottom
JP2  LED  [SMT-JUMPER_2_NC_TRACE_SILK]  51.05,11.43 90 bottom
JP3  LED  [SMT-JUMPER_2_NC_TRACE_SILK]  76.96,11.43 90 bottom
JP4  LED  [SMT-JUMPER_2_NC_TRACE_SILK]  102.87,11.43 90 bottom
JP5  LED  [SMT-JUMPER_2_NC_TRACE_SILK]  25.15,39.88 90 bottom
JP6  LED  [SMT-JUMPER_2_NC_TRACE_SILK]  51.05,39.88 90 bottom
JP7  LED  [SMT-JUMPER_2_NC_TRACE_SILK]  76.96,39.88 90 bottom
JP8  LED  [SMT-JUMPER_2_NC_TRACE_SILK]  102.87,39.88 90 bottom
JP9  LED  [SMT-JUMPER_2_NC_TRACE_SILK]  25.15,68.33 90 bottom
JP10  LED  [SMT-JUMPER_2_NC_TRACE_SILK]  51.05,68.33 90 bottom
JP11  LED  [SMT-JUMPER_2_NC_TRACE_SILK]  76.96,68.33 90 bottom
JP12  LED  [SMT-JUMPER_2_NC_TRACE_SILK]  102.87,68.33 90 bottom
JP13  LED  [SMT-JUMPER_2_NC_TRACE_SILK]  25.15,96.77 90 bottom
JP14  LED  [SMT-JUMPER_2_NC_TRACE_SILK]  51.05,96.77 90 bottom
JP15  LED  [SMT-JUMPER_2_NC_TRACE_SILK]  76.96,96.77 90 bottom
JP16  LED  [SMT-JUMPER_2_NC_TRACE_SILK]  102.87,96.77 90 bottom
JP17  LED  [SMT-JUMPER_2_NC_TRACE_SILK]  25.15,125.22 90 bottom
JP18  LED  [SMT-JUMPER_2_NC_TRACE_SILK]  51.05,125.22 90 bottom
JP19  LED  [SMT-JUMPER_2_NC_TRACE_SILK]  76.96,125.22 90 bottom
JP20  LED  [SMT-JUMPER_2_NC_TRACE_SILK]  102.87,125.22 90 bottom
LOGO1  SFE_LOGO_NAME.1_INCH  [SFE_LOGO_NAME_.1]  20.07,17.02 0 bottom
LOGO2  SFE_LOGO_FLAME.2_INCH  [SFE_LOGO_FLAME_.2]  19.3,26.16 0 top
LOGO3  OSHW-LOGOS  [OSHW-LOGO-S]  23.11,27.43 0 bottom
LOGO4  QWIIC_LOGO_3MM  [QWIIC_3MM]  19.52,15.86 0 top
LOGO5  OSHW-LOGOS  [OSHW-LOGO-S]  49.02,27.43 0 bottom
LOGO6  SFE_LOGO_FLAME.2_INCH  [SFE_LOGO_FLAME_.2]  45.21,26.16 0 top
LOGO7  SFE_LOGO_NAME.1_INCH  [SFE_LOGO_NAME_.1]  45.97,17.02 0 bottom
LOGO8  QWIIC_LOGO_3MM  [QWIIC_3MM]  45.43,15.86 0 top
LOGO9  OSHW-LOGOS  [OSHW-LOGO-S]  74.93,27.43 0 bottom
LOGO10  SFE_LOGO_FLAME.2_INCH  [SFE_LOGO_FLAME_.2]  71.12,26.16 0 top
LOGO11  SFE_LOGO_NAME.1_INCH  [SFE_LOGO_NAME_.1]  71.88,17.02 0 bottom
LOGO12  QWIIC_LOGO_3MM  [QWIIC_3MM]  71.34,15.86 0 top
LOGO13  OSHW-LOGOS  [OSHW-LOGO-S]  100.84,27.43 0 bottom
LOGO14  SFE_LOGO_FLAME.2_INCH  [SFE_LOGO_FLAME_.2]  97.03,26.16 0 top
LOGO15  SFE_LOGO_NAME.1_INCH  [SFE_LOGO_NAME_.1]  97.79,17.02 0 bottom
LOGO16  QWIIC_LOGO_3MM  [QWIIC_3MM]  97.24,15.86 0 top
LOGO17  OSHW-LOGOS  [OSHW-LOGO-S]  23.11,55.88 0 bottom
LOGO18  SFE_LOGO_FLAME.2_INCH  [SFE_LOGO_FLAME_.2]  19.3,54.61 0 top
LOGO19  SFE_LOGO_NAME.1_INCH  [SFE_LOGO_NAME_.1]  20.07,45.47 0 bottom
LOGO20  QWIIC_LOGO_3MM  [QWIIC_3MM]  19.52,44.31 0 top
LOGO21  OSHW-LOGOS  [OSHW-LOGO-S]  49.02,55.88 0 bottom
LOGO22  SFE_LOGO_FLAME.2_INCH  [SFE_LOGO_FLAME_.2]  45.21,54.61 0 top
LOGO23  SFE_LOGO_NAME.1_INCH  [SFE_LOGO_NAME_.1]  45.97,45.47 0 bottom
LOGO24  QWIIC_LOGO_3MM  [QWIIC_3MM]  45.43,44.31 0 top
LOGO25  OSHW-LOGOS  [OSHW-LOGO-S]  74.93,55.88 0 bottom
LOGO26  SFE_LOGO_FLAME.2_INCH  [SFE_LOGO_FLAME_.2]  71.12,54.61 0 top
LOGO27  SFE_LOGO_NAME.1_INCH  [SFE_LOGO_NAME_.1]  71.88,45.47 0 bottom
LOGO28  QWIIC_LOGO_3MM  [QWIIC_3MM]  71.34,44.31 0 top
LOGO29  OSHW-LOGOS  [OSHW-LOGO-S]  100.84,55.88 0 bottom
LOGO30  SFE_LOGO_FLAME.2_INCH  [SFE_LOGO_FLAME_.2]  97.03,54.61 0 top
LOGO31  SFE_LOGO_NAME.1_INCH  [SFE_LOGO_NAME_.1]  97.79,45.47 0 bottom
LOGO32  QWIIC_LOGO_3MM  [QWIIC_3MM]  97.24,44.31 0 top
LOGO33  OSHW-LOGOS  [OSHW-LOGO-S]  23.11,84.33 0 bottom
LOGO34  SFE_LOGO_FLAME.2_INCH  [SFE_LOGO_FLAME_.2]  19.3,83.06 0 top
LOGO35  SFE_LOGO_NAME.1_INCH  [SFE_LOGO_NAME_.1]  20.07,73.91 0 bottom
LOGO36  QWIIC_LOGO_3MM  [QWIIC_3MM]  19.52,72.76 0 top
LOGO37  OSHW-LOGOS  [OSHW-LOGO-S]  49.02,84.33 0 bottom
LOGO38  SFE_LOGO_FLAME.2_INCH  [SFE_LOGO_FLAME_.2]  45.21,83.06 0 top
LOGO39  SFE_LOGO_NAME.1_INCH  [SFE_LOGO_NAME_.1]  45.97,73.91 0 bottom
LOGO40  QWIIC_LOGO_3MM  [QWIIC_3MM]  45.43,72.76 0 top
LOGO41  OSHW-LOGOS  [OSHW-LOGO-S]  74.93,84.33 0 bottom
LOGO42  SFE_LOGO_FLAME.2_INCH  [SFE_LOGO_FLAME_.2]  71.12,83.06 0 top
LOGO43  SFE_LOGO_NAME.1_INCH  [SFE_LOGO_NAME_.1]  71.88,73.91 0 bottom
LOGO44  QWIIC_LOGO_3MM  [QWIIC_3MM]  71.34,72.76 0 top
LOGO45  OSHW-LOGOS  [OSHW-LOGO-S]  100.84,84.33 0 bottom
LOGO46  SFE_LOGO_FLAME.2_INCH  [SFE_LOGO_FLAME_.2]  97.03,83.06 0 top
LOGO47  SFE_LOGO_NAME.1_INCH  [SFE_LOGO_NAME_.1]  97.79,73.91 0 bottom
LOGO48  QWIIC_LOGO_3MM  [QWIIC_3MM]  97.24,72.76 0 top
LOGO49  OSHW-LOGOS  [OSHW-LOGO-S]  23.11,112.78 0 bottom
LOGO50  SFE_LOGO_FLAME.2_INCH  [SFE_LOGO_FLAME_.2]  19.3,111.51 0 top
LOGO51  SFE_LOGO_NAME.1_INCH  [SFE_LOGO_NAME_.1]  20.07,102.36 0 bottom
LOGO52  QWIIC_LOGO_3MM  [QWIIC_3MM]  19.52,101.21 0 top
LOGO53  OSHW-LOGOS  [OSHW-LOGO-S]  49.02,112.78 0 bottom
LOGO54  SFE_LOGO_FLAME.2_INCH  [SFE_LOGO_FLAME_.2]  45.21,111.51 0 top
LOGO55  SFE_LOGO_NAME.1_INCH  [SFE_LOGO_NAME_.1]  45.97,102.36 0 bottom
LOGO56  QWIIC_LOGO_3MM  [QWIIC_3MM]  45.43,101.21 0 top
LOGO57  OSHW-LOGOS  [OSHW-LOGO-S]  74.93,112.78 0 bottom
LOGO58  SFE_LOGO_FLAME.2_INCH  [SFE_LOGO_FLAME_.2]  71.12,111.51 0 top
LOGO59  SFE_LOGO_NAME.1_INCH  [SFE_LOGO_NAME_.1]  71.88,102.36 0 bottom
LOGO60  QWIIC_LOGO_3MM  [QWIIC_3MM]  71.34,101.21 0 top
LOGO61  OSHW-LOGOS  [OSHW-LOGO-S]  100.84,112.78 0 bottom
LOGO62  SFE_LOGO_FLAME.2_INCH  [SFE_LOGO_FLAME_.2]  97.03,111.51 0 top
LOGO63  SFE_LOGO_NAME.1_INCH  [SFE_LOGO_NAME_.1]  97.79,102.36 0 bottom
LOGO64  QWIIC_LOGO_3MM  [QWIIC_3MM]  97.24,101.21 0 top
LOGO65  OSHW-LOGOS  [OSHW-LOGO-S]  23.11,141.22 0 bottom
LOGO66  SFE_LOGO_FLAME.2_INCH  [SFE_LOGO_FLAME_.2]  19.3,139.95 0 top
LOGO67  SFE_LOGO_NAME.1_INCH  [SFE_LOGO_NAME_.1]  20.07,130.81 0 bottom
LOGO68  QWIIC_LOGO_3MM  [QWIIC_3MM]  19.52,129.65 0 top
LOGO69  OSHW-LOGOS  [OSHW-LOGO-S]  49.02,141.22 0 bottom
LOGO70  SFE_LOGO_FLAME.2_INCH  [SFE_LOGO_FLAME_.2]  45.21,139.95 0 top
LOGO71  SFE_LOGO_NAME.1_INCH  [SFE_LOGO_NAME_.1]  45.97,130.81 0 bottom
LOGO72  QWIIC_LOGO_3MM  [QWIIC_3MM]  45.43,129.65 0 top
LOGO73  OSHW-LOGOS  [OSHW-LOGO-S]  74.93,141.22 0 bottom
LOGO74  SFE_LOGO_FLAME.2_INCH  [SFE_LOGO_FLAME_.2]  71.12,139.95 0 top
LOGO75  SFE_LOGO_NAME.1_INCH  [SFE_LOGO_NAME_.1]  71.88,130.81 0 bottom
LOGO76  QWIIC_LOGO_3MM  [QWIIC_3MM]  71.34,129.65 0 top
LOGO77  OSHW-LOGOS  [OSHW-LOGO-S]  100.84,141.22 0 bottom
LOGO78  SFE_LOGO_FLAME.2_INCH  [SFE_LOGO_FLAME_.2]  97.03,139.95 0 top
LOGO79  SFE_LOGO_NAME.1_INCH  [SFE_LOGO_NAME_.1]  97.79,130.81 0 bottom
LOGO80  QWIIC_LOGO_3MM  [QWIIC_3MM]  97.24,129.65 0 top
Q1  3.1A/30V/105mΩ  [SOT23-3]  23.77,27.61 180 top
Q2  3.1A/30V/105mΩ  [SOT23-3]  49.68,27.61 180 top
Q3  3.1A/30V/105mΩ  [SOT23-3]  75.59,27.61 180 top
Q4  3.1A/30V/105mΩ  [SOT23-3]  101.5,27.61 180 top
Q5  3.1A/30V/105mΩ  [SOT23-3]  23.77,56.06 180 top
Q6  3.1A/30V/105mΩ  [SOT23-3]  49.68,56.06 180 top
Q7  3.1A/30V/105mΩ  [SOT23-3]  75.59,56.06 180 top
Q8  3.1A/30V/105mΩ  [SOT23-3]  101.5,56.06 180 top
Q9  3.1A/30V/105mΩ  [SOT23-3]  23.77,84.51 180 top
Q10  3.1A/30V/105mΩ  [SOT23-3]  49.68,84.51 180 top
Q11  3.1A/30V/105mΩ  [SOT23-3]  75.59,84.51 180 top
Q12  3.1A/30V/105mΩ  [SOT23-3]  101.5,84.51 180 top
Q13  3.1A/30V/105mΩ  [SOT23-3]  23.77,112.95 180 top
Q14  3.1A/30V/105mΩ  [SOT23-3]  49.68,112.95 180 top
Q15  3.1A/30V/105mΩ  [SOT23-3]  75.59,112.95 180 top
Q16  3.1A/30V/105mΩ  [SOT23-3]  101.5,112.95 180 top
Q17  3.1A/30V/105mΩ  [SOT23-3]  23.77,141.4 180 top
Q18  3.1A/30V/105mΩ  [SOT23-3]  49.68,141.4 180 top
Q19  3.1A/30V/105mΩ  [SOT23-3]  75.59,141.4 180 top
Q20  3.1A/30V/105mΩ  [SOT23-3]  101.5,141.4 180 top
R1  10k  [0402]  26.99,28.89 180 top
R2  10k  [0402]  23.52,22.89 270 top
R3  1K  [0402]  25.02,10.36 0 top
R4  10k  [0402]  24.89,22.89 270 top
R5  1K  [0402]  13.46,10.44 0 top
R6  1K  [0402]  50.93,10.36 0 top
R7  10k  [0402]  50.8,22.89 270 top
R8  10k  [0402]  49.43,22.89 270 top
R9  10k  [0402]  52.9,28.89 180 top
R10  1K  [0402]  39.37,10.44 0 top
R11  1K  [0402]  76.84,10.36 0 top
R12  10k  [0402]  76.71,22.89 270 top
R13  10k  [0402]  75.34,22.89 270 top
R14  10k  [0402]  78.8,28.89 180 top
R15  1K  [0402]  65.28,10.44 0 top
R16  1K  [0402]  102.74,10.36 0 top
R17  10k  [0402]  102.62,22.89 270 top
R18  10k  [0402]  101.24,22.89 270 top
R19  10k  [0402]  104.71,28.89 180 top
R20  1K  [0402]  91.19,10.44 0 top
R21  1K  [0402]  25.02,38.81 0 top
R22  10k  [0402]  24.89,51.33 270 top
R23  10k  [0402]  23.52,51.33 270 top
R24  10k  [0402]  26.99,57.34 180 top
R25  1K  [0402]  13.46,38.89 0 top
R26  1K  [0402]  50.93,38.81 0 top
R27  10k  [0402]  50.8,51.33 270 top
R28  10k  [0402]  49.43,51.33 270 top
R29  10k  [0402]  52.9,57.34 180 top
R30  1K  [0402]  39.37,38.89 0 top
R31  1K  [0402]  76.84,38.81 0 top
R32  10k  [0402]  76.71,51.33 270 top
R33  10k  [0402]  75.34,51.33 270 top
R34  10k  [0402]  78.8,57.34 180 top
R35  1K  [0402]  65.28,38.89 0 top
R36  1K  [0402]  102.74,38.81 0 top
R37  10k  [0402]  102.62,51.33 270 top
R38  10k  [0402]  101.24,51.33 270 top
R39  10k  [0402]  104.71,57.34 180 top
R40  1K  [0402]  91.19,38.89 0 top
R41  1K  [0402]  25.02,67.26 0 top
R42  10k  [0402]  24.89,79.78 270 top
R43  10k  [0402]  23.52,79.78 270 top
R44  10k  [0402]  26.99,85.79 180 top
R45  1K  [0402]  13.46,67.34 0 top
R46  1K  [0402]  50.93,67.26 0 top
R47  10k  [0402]  50.8,79.78 270 top
R48  10k  [0402]  49.43,79.78 270 top
R49  10k  [0402]  52.9,85.79 180 top
R50  1K  [0402]  39.37,67.34 0 top
R51  1K  [0402]  76.84,67.26 0 top
R52  10k  [0402]  76.71,79.78 270 top
R53  10k  [0402]  75.34,79.78 270 top
R54  10k  [0402]  78.8,85.79 180 top
R55  1K  [0402]  65.28,67.34 0 top
R56  1K  [0402]  102.74,67.26 0 top
R57  10k  [0402]  102.62,79.78 270 top
R58  10k  [0402]  101.24,79.78 270 top
R59  10k  [0402]  104.71,85.79 180 top
R60  1K  [0402]  91.19,67.34 0 top
R61  1K  [0402]  25.02,95.71 0 top
R62  10k  [0402]  24.89,108.23 270 top
R63  10k  [0402]  23.52,108.23 270 top
R64  10k  [0402]  26.99,114.24 180 top
R65  1K  [0402]  13.46,95.78 0 top
R66  1K  [0402]  50.93,95.71 0 top
R67  10k  [0402]  50.8,108.23 270 top
R68  10k  [0402]  49.43,108.23 270 top
R69  10k  [0402]  52.9,114.24 180 top
R70  1K  [0402]  39.37,95.78 0 top
R71  1K  [0402]  76.84,95.71 0 top
R72  10k  [0402]  76.71,108.23 270 top
R73  10k  [0402]  75.34,108.23 270 top
R74  10k  [0402]  78.8,114.24 180 top
R75  1K  [0402]  65.28,95.78 0 top
R76  1K  [0402]  102.74,95.71 0 top
R77  10k  [0402]  102.62,108.23 270 top
R78  10k  [0402]  101.24,108.23 270 top
R79  10k  [0402]  104.71,114.24 180 top
R80  1K  [0402]  91.19,95.78 0 top
R81  1K  [0402]  25.02,124.16 0 top
R82  10k  [0402]  24.89,136.68 270 top
R83  10k  [0402]  23.52,136.68 270 top
R84  10k  [0402]  26.99,142.68 180 top
R85  1K  [0402]  13.46,124.23 0 top
R86  1K  [0402]  50.93,124.16 0 top
R87  10k  [0402]  50.8,136.68 270 top
R88  10k  [0402]  49.43,136.68 270 top
R89  10k  [0402]  52.9,142.68 180 top
R90  1K  [0402]  39.37,124.23 0 top
R91  1K  [0402]  76.84,124.16 0 top
R92  10k  [0402]  76.71,136.68 270 top
R93  10k  [0402]  75.34,136.68 270 top
R94  10k  [0402]  78.8,142.68 180 top
R95  1K  [0402]  65.28,124.23 0 top
R96  1K  [0402]  102.74,124.16 0 top
R97  10k  [0402]  102.62,136.68 270 top
R98  10k  [0402]  101.24,136.68 270 top
R99  10k  [0402]  104.71,142.68 180 top
R100  1K  [0402]  91.19,124.23 0 top
S1  [SWITCH_SPST_SMD_A]  22.61,33.12 0 top
S2  MOMENTARY-SWITCH-SPST-SMD-4.6X2.8MM  [TACTILE_SWITCH_SMD_4.6X2.8MM]  27.1,24.89 90 top
S3  [SWITCH_SPST_SMD_A]  48.51,33.12 0 top
S4  MOMENTARY-SWITCH-SPST-SMD-4.6X2.8MM  [TACTILE_SWITCH_SMD_4.6X2.8MM]  53.01,24.89 90 top
S5  [SWITCH_SPST_SMD_A]  74.42,33.12 0 top
S6  MOMENTARY-SWITCH-SPST-SMD-4.6X2.8MM  [TACTILE_SWITCH_SMD_4.6X2.8MM]  78.92,24.89 90 top
S7  [SWITCH_SPST_SMD_A]  100.33,33.12 0 top
S8  MOMENTARY-SWITCH-SPST-SMD-4.6X2.8MM  [TACTILE_SWITCH_SMD_4.6X2.8MM]  104.83,24.89 90 top
S9  [SWITCH_SPST_SMD_A]  22.61,61.57 0 top
S10  MOMENTARY-SWITCH-SPST-SMD-4.6X2.8MM  [TACTILE_SWITCH_SMD_4.6X2.8MM]  27.1,53.34 90 top
S11  [SWITCH_SPST_SMD_A]  48.51,61.57 0 top
S12  MOMENTARY-SWITCH-SPST-SMD-4.6X2.8MM  [TACTILE_SWITCH_SMD_4.6X2.8MM]  53.01,53.34 90 top
S13  [SWITCH_SPST_SMD_A]  74.42,61.57 0 top
S14  MOMENTARY-SWITCH-SPST-SMD-4.6X2.8MM  [TACTILE_SWITCH_SMD_4.6X2.8MM]  78.92,53.34 90 top
S15  [SWITCH_SPST_SMD_A]  100.33,61.57 0 top
S16  MOMENTARY-SWITCH-SPST-SMD-4.6X2.8MM  [TACTILE_SWITCH_SMD_4.6X2.8MM]  104.83,53.34 90 top
S17  [SWITCH_SPST_SMD_A]  22.61,90.02 0 top
S18  MOMENTARY-SWITCH-SPST-SMD-4.6X2.8MM  [TACTILE_SWITCH_SMD_4.6X2.8MM]  27.1,81.79 90 top
S19  [SWITCH_SPST_SMD_A]  48.51,90.02 0 top
S20  MOMENTARY-SWITCH-SPST-SMD-4.6X2.8MM  [TACTILE_SWITCH_SMD_4.6X2.8MM]  53.01,81.79 90 top
S21  [SWITCH_SPST_SMD_A]  74.42,90.02 0 top
S22  MOMENTARY-SWITCH-SPST-SMD-4.6X2.8MM  [TACTILE_SWITCH_SMD_4.6X2.8MM]  78.92,81.79 90 top
S23  [SWITCH_SPST_SMD_A]  100.33,90.02 0 top
S24  MOMENTARY-SWITCH-SPST-SMD-4.6X2.8MM  [TACTILE_SWITCH_SMD_4.6X2.8MM]  104.83,81.79 90 top
S25  [SWITCH_SPST_SMD_A]  22.61,118.47 0 top
S26  MOMENTARY-SWITCH-SPST-SMD-4.6X2.8MM  [TACTILE_SWITCH_SMD_4.6X2.8MM]  27.1,110.24 90 top
S27  [SWITCH_SPST_SMD_A]  48.51,118.47 0 top
S28  MOMENTARY-SWITCH-SPST-SMD-4.6X2.8MM  [TACTILE_SWITCH_SMD_4.6X2.8MM]  53.01,110.24 90 top
S29  [SWITCH_SPST_SMD_A]  74.42,118.47 0 top
S30  MOMENTARY-SWITCH-SPST-SMD-4.6X2.8MM  [TACTILE_SWITCH_SMD_4.6X2.8MM]  78.92,110.24 90 top
S31  [SWITCH_SPST_SMD_A]  100.33,118.47 0 top
S32  MOMENTARY-SWITCH-SPST-SMD-4.6X2.8MM  [TACTILE_SWITCH_SMD_4.6X2.8MM]  104.83,110.24 90 top
S33  [SWITCH_SPST_SMD_A]  22.61,146.91 0 top
S34  MOMENTARY-SWITCH-SPST-SMD-4.6X2.8MM  [TACTILE_SWITCH_SMD_4.6X2.8MM]  27.1,138.68 90 top
S35  [SWITCH_SPST_SMD_A]  48.51,146.91 0 top
S36  MOMENTARY-SWITCH-SPST-SMD-4.6X2.8MM  [TACTILE_SWITCH_SMD_4.6X2.8MM]  53.01,138.68 90 top
S37  [SWITCH_SPST_SMD_A]  74.42,146.91 0 top
S38  MOMENTARY-SWITCH-SPST-SMD-4.6X2.8MM  [TACTILE_SWITCH_SMD_4.6X2.8MM]  78.92,138.68 90 top
S39  [SWITCH_SPST_SMD_A]  100.33,146.91 0 top
S40  MOMENTARY-SWITCH-SPST-SMD-4.6X2.8MM  [TACTILE_SWITCH_SMD_4.6X2.8MM]  104.83,138.68 90 top
TP1  TEST-POINTTP_15TH_THRU  [TP_15TH]  23.7,29.9 0 top
TP2  TEST-POINTTP_15TH_THRU  [TP_15TH]  22.68,26.34 0 top
TP3  TEST-POINTTP_15TH_THRU  [TP_15TH]  21.13,22.63 0 top
TP4  TEST-POINTTP_15TH_THRU  [TP_15TH]  49.61,29.9 0 top
TP5  TEST-POINTTP_15TH_THRU  [TP_15TH]  47.04,22.63 0 top
TP6  TEST-POINTTP_15TH_THRU  [TP_15TH]  48.59,26.34 0 top
TP7  TEST-POINTTP_15TH_THRU  [TP_15TH]  75.51,29.9 0 top
TP8  TEST-POINTTP_15TH_THRU  [TP_15TH]  72.95,22.63 0 top
TP9  TEST-POINTTP_15TH_THRU  [TP_15TH]  74.5,26.34 0 top
TP10  TEST-POINTTP_15TH_THRU  [TP_15TH]  101.42,29.9 0 top
TP11  TEST-POINTTP_15TH_THRU  [TP_15TH]  98.86,22.63 0 top
TP12  TEST-POINTTP_15TH_THRU  [TP_15TH]  100.41,26.34 0 top
TP13  TEST-POINTTP_15TH_THRU  [TP_15TH]  23.7,58.34 0 top
TP14  TEST-POINTTP_15TH_THRU  [TP_15TH]  21.13,51.08 0 top
TP15  TEST-POINTTP_15TH_THRU  [TP_15TH]  22.68,54.79 0 top
TP16  TEST-POINTTP_15TH_THRU  [TP_15TH]  49.61,58.34 0 top
TP17  TEST-POINTTP_15TH_THRU  [TP_15TH]  47.04,51.08 0 top
TP18  TEST-POINTTP_15TH_THRU  [TP_15TH]  48.59,54.79 0 top
TP19  TEST-POINTTP_15TH_THRU  [TP_15TH]  75.51,58.34 0 top
TP20  TEST-POINTTP_15TH_THRU  [TP_15TH]  72.95,51.08 0 top
TP21  TEST-POINTTP_15TH_THRU  [TP_15TH]  74.5,54.79 0 top
TP22  TEST-POINTTP_15TH_THRU  [TP_15TH]  101.42,58.34 0 top
TP23  TEST-POINTTP_15TH_THRU  [TP_15TH]  98.86,51.08 0 top
TP24  TEST-POINTTP_15TH_THRU  [TP_15TH]  100.41,54.79 0 top
TP25  TEST-POINTTP_15TH_THRU  [TP_15TH]  23.7,86.79 0 top
TP26  TEST-POINTTP_15TH_THRU  [TP_15TH]  21.13,79.53 0 top
TP27  TEST-POINTTP_15TH_THRU  [TP_15TH]  22.68,83.24 0 top
TP28  TEST-POINTTP_15TH_THRU  [TP_15TH]  49.61,86.79 0 top
TP29  TEST-POINTTP_15TH_THRU  [TP_15TH]  47.04,79.53 0 top
TP30  TEST-POINTTP_15TH_THRU  [TP_15TH]  48.59,83.24 0 top
TP31  TEST-POINTTP_15TH_THRU  [TP_15TH]  75.51,86.79 0 top
TP32  TEST-POINTTP_15TH_THRU  [TP_15TH]  72.95,79.53 0 top
TP33  TEST-POINTTP_15TH_THRU  [TP_15TH]  74.5,83.24 0 top
TP34  TEST-POINTTP_15TH_THRU  [TP_15TH]  101.42,86.79 0 top
TP35  TEST-POINTTP_15TH_THRU  [TP_15TH]  98.86,79.53 0 top
TP36  TEST-POINTTP_15TH_THRU  [TP_15TH]  100.41,83.24 0 top
TP37  TEST-POINTTP_15TH_THRU  [TP_15TH]  23.7,115.24 0 top
TP38  TEST-POINTTP_15TH_THRU  [TP_15TH]  21.13,107.98 0 top
TP39  TEST-POINTTP_15TH_THRU  [TP_15TH]  22.68,111.68 0 top
TP40  TEST-POINTTP_15TH_THRU  [TP_15TH]  49.61,115.24 0 top
TP41  TEST-POINTTP_15TH_THRU  [TP_15TH]  47.04,107.98 0 top
TP42  TEST-POINTTP_15TH_THRU  [TP_15TH]  48.59,111.68 0 top
TP43  TEST-POINTTP_15TH_THRU  [TP_15TH]  75.51,115.24 0 top
TP44  TEST-POINTTP_15TH_THRU  [TP_15TH]  72.95,107.98 0 top
TP45  TEST-POINTTP_15TH_THRU  [TP_15TH]  74.5,111.68 0 top
TP46  TEST-POINTTP_15TH_THRU  [TP_15TH]  101.42,115.24 0 top
TP47  TEST-POINTTP_15TH_THRU  [TP_15TH]  98.86,107.98 0 top
TP48  TEST-POINTTP_15TH_THRU  [TP_15TH]  100.41,111.68 0 top
TP49  TEST-POINTTP_15TH_THRU  [TP_15TH]  23.7,143.69 0 top
TP50  TEST-POINTTP_15TH_THRU  [TP_15TH]  21.13,136.42 0 top
TP51  TEST-POINTTP_15TH_THRU  [TP_15TH]  22.68,140.13 0 top
TP52  TEST-POINTTP_15TH_THRU  [TP_15TH]  49.61,143.69 0 top
TP53  TEST-POINTTP_15TH_THRU  [TP_15TH]  47.04,136.42 0 top
TP54  TEST-POINTTP_15TH_THRU  [TP_15TH]  48.59,140.13 0 top
TP55  TEST-POINTTP_15TH_THRU  [TP_15TH]  75.51,143.69 0 top
TP56  TEST-POINTTP_15TH_THRU  [TP_15TH]  72.95,136.42 0 top
TP57  TEST-POINTTP_15TH_THRU  [TP_15TH]  74.5,140.13 0 top
TP58  TEST-POINTTP_15TH_THRU  [TP_15TH]  101.42,143.69 0 top
TP59  TEST-POINTTP_15TH_THRU  [TP_15TH]  98.86,136.42 0 top
TP60  TEST-POINTTP_15TH_THRU  [TP_15TH]  100.41,140.13 0 top
U1  3.3V  [SOT23-5]  26.09,15.77 0 top
U2  W25Q32FV  [SOIC-8]  16.51,21.51 270 bottom
U3  ATSAMD21E18A-U  [QFN-32_SAMD]  14.48,20.83 90 top
U4  3.3V  [SOT23-5]  51.99,15.77 0 top
U5  W25Q32FV  [SOIC-8]  42.42,21.51 270 bottom
U6  ATSAMD21E18A-U  [QFN-32_SAMD]  40.39,20.83 90 top
U7  3.3V  [SOT23-5]  77.9,15.77 0 top
U8  W25Q32FV  [SOIC-8]  68.33,21.51 270 bottom
U9  ATSAMD21E18A-U  [QFN-32_SAMD]  66.29,20.83 90 top
U10  3.3V  [SOT23-5]  103.81,15.77 0 top
U11  W25Q32FV  [SOIC-8]  94.23,21.51 270 bottom
U12  ATSAMD21E18A-U  [QFN-32_SAMD]  92.2,20.83 90 top
U13  3.3V  [SOT23-5]  26.09,44.22 0 top
U14  W25Q32FV  [SOIC-8]  16.51,49.96 270 bottom
U15  ATSAMD21E18A-U  [QFN-32_SAMD]  14.48,49.28 90 top
U16  3.3V  [SOT23-5]  51.99,44.22 0 top
U17  W25Q32FV  [SOIC-8]  42.42,49.96 270 bottom
U18  ATSAMD21E18A-U  [QFN-32_SAMD]  40.39,49.28 90 top
U19  3.3V  [SOT23-5]  77.9,44.22 0 top
U20  W25Q32FV  [SOIC-8]  68.33,49.96 270 bottom
U21  ATSAMD21E18A-U  [QFN-32_SAMD]  66.29,49.28 90 top
U22  3.3V  [SOT23-5]  103.81,44.22 0 top
U23  W25Q32FV  [SOIC-8]  94.23,49.96 270 bottom
U24  ATSAMD21E18A-U  [QFN-32_SAMD]  92.2,49.28 90 top
U25  3.3V  [SOT23-5]  26.09,72.67 0 top
U26  W25Q32FV  [SOIC-8]  16.51,78.41 270 bottom
U27  ATSAMD21E18A-U  [QFN-32_SAMD]  14.48,77.72 90 top
U28  3.3V  [SOT23-5]  51.99,72.67 0 top
U29  W25Q32FV  [SOIC-8]  42.42,78.41 270 bottom
U30  ATSAMD21E18A-U  [QFN-32_SAMD]  40.39,77.72 90 top
U31  3.3V  [SOT23-5]  77.9,72.67 0 top
U32  W25Q32FV  [SOIC-8]  68.33,78.41 270 bottom
U33  ATSAMD21E18A-U  [QFN-32_SAMD]  66.29,77.72 90 top
U34  3.3V  [SOT23-5]  103.81,72.67 0 top
U35  W25Q32FV  [SOIC-8]  94.23,78.41 270 bottom
U36  ATSAMD21E18A-U  [QFN-32_SAMD]  92.2,77.72 90 top
U37  3.3V  [SOT23-5]  26.09,101.12 0 top
U38  W25Q32FV  [SOIC-8]  16.51,106.86 270 bottom
U39  ATSAMD21E18A-U  [QFN-32_SAMD]  14.48,106.17 90 top
U40  3.3V  [SOT23-5]  51.99,101.12 0 top
U41  W25Q32FV  [SOIC-8]  42.42,106.86 270 bottom
U42  ATSAMD21E18A-U  [QFN-32_SAMD]  40.39,106.17 90 top
U43  3.3V  [SOT23-5]  77.9,101.12 0 top
U44  W25Q32FV  [SOIC-8]  68.33,106.86 270 bottom
U45  ATSAMD21E18A-U  [QFN-32_SAMD]  66.29,106.17 90 top
U46  3.3V  [SOT23-5]  103.81,101.12 0 top
U47  W25Q32FV  [SOIC-8]  94.23,106.86 270 bottom
U48  ATSAMD21E18A-U  [QFN-32_SAMD]  92.2,106.17 90 top
U49  3.3V  [SOT23-5]  26.09,129.57 0 top
U50  W25Q32FV  [SOIC-8]  16.51,135.31 270 bottom
U51  ATSAMD21E18A-U  [QFN-32_SAMD]  14.48,134.62 90 top
U52  3.3V  [SOT23-5]  51.99,129.57 0 top
U53  W25Q32FV  [SOIC-8]  42.42,135.31 270 bottom
U54  ATSAMD21E18A-U  [QFN-32_SAMD]  40.39,134.62 90 top
U55  3.3V  [SOT23-5]  77.9,129.57 0 top
U56  W25Q32FV  [SOIC-8]  68.33,135.31 270 bottom
U57  ATSAMD21E18A-U  [QFN-32_SAMD]  66.29,134.62 90 top
U58  3.3V  [SOT23-5]  103.81,129.57 0 top
U59  W25Q32FV  [SOIC-8]  94.23,135.31 270 bottom
U60  ATSAMD21E18A-U  [QFN-32_SAMD]  92.2,134.62 90 top
U$1  [D00]  30.58,21.03 0 bottom
U$2  [GND-03]  30.63,15.9 0 bottom
U$3  [#23]  20.07,27.18 0 bottom
U$4  [#24]  15.37,26.92 0 bottom
U$5  [3#3V10]  29.24,16.46 90 top
U$6  [D12]  8.13,31.5 90 top
U$7  [D166]  29.21,26.92 90 top
U$8  [D177]  29.21,24.38 90 top
U$9  [D16#TX4]  30.56,28.42 0 bottom
U$10  [QWIIC2]  24.13,15.24 0 bottom
U$11  [D17#RX3]  30.56,25.86 0 bottom
U$12  [D75]  8.64,15.75 0 top
U$13  [DAC1]  8.13,31.5 90 bottom
U$14  [MISO0]  12.53,25.86 0 bottom
U$15  [SAMD213]  22.1,13.46 0 bottom
U$16  [MOSI2]  12.55,28.45 0 bottom
U$17  [3V3-03]  30.68,18.49 0 bottom
U$18  [ON12]  26.78,31.05 0 bottom
U$19  [OFF13]  23.66,31.04 0 bottom
U$20  [SCK7]  12.09,23.37 0 bottom
U$21  [RESET0]  21.31,25.02 0 top
U$22  [D85]  30.56,23.62 0 bottom
U$23  [MICRO2]  18.8,15.24 0 bottom
U$24  [LED1]  27.03,9.79 90 bottom
U$25  [D50]  11.23,20.83 0 bottom
U$26  [D61]  11.23,18.29 0 bottom
U$27  [D72]  11.23,15.77 0 bottom
U$28  [D21]  8.64,28.45 0 top
U$29  [D136]  12.27,13.16 0 top
U$30  [#23]  45.97,27.18 0 bottom
U$31  [#24]  41.27,26.92 0 bottom
U$32  [3#3V10]  55.14,16.46 90 top
U$33  [D33]  34.54,25.91 0 top
U$34  [D41]  34.54,23.37 0 top
U$35  [D52]  34.56,20.07 0 top
U$36  [D33]  8.64,25.91 0 top
U$37  [D41]  8.64,23.37 0 top
U$38  [D52]  8.65,20.07 0 top
U$39  [D65]  8.64,18.29 0 top
U$40  [D65]  34.54,18.29 0 top
U$41  [GND11]  55.14,13.92 90 top
U$42  [OFF13]  43.65,30.02 0 top
U$43  [ON12]  50.69,30.04 0 top
U$44  [GND11]  29.24,13.92 90 top
U$45  [OFF13]  17.74,30.02 0 top
U$46  [ON12]  24.78,30.04 0 top
U$47  [PWR16]  23.5,12.97 0 top
U$48  [PWR16]  49.4,12.97 0 top
U$49  [SCL8]  29.24,21.92 90 top
U$50  [SDA9]  29.24,19.33 90 top
U$51  [SCL8]  55.14,21.92 90 top
U$52  [SDA9]  55.14,19.33 90 top
U$53  [RESET0]  47.22,25.02 0 top
U$54  [SCK7]  38,23.37 0 bottom
U$55  [MISO0]  38.44,25.86 0 bottom
U$56  [LED1]  52.93,9.79 90 bottom
U$57  [ON12]  52.69,31.05 0 bottom
U$58  [OFF13]  49.57,31.04 0 bottom
U$59  [D00]  56.49,21.03 0 bottom
U$60  [D12]  34.04,31.5 90 top
U$61  [QWIIC2]  50.04,15.24 0 bottom
U$62  [MICRO2]  44.7,15.24 0 bottom
U$63  [SAMD213]  48.01,13.46 0 bottom
U$64  [GND-03]  56.54,15.9 0 bottom
U$65  [3V3-03]  56.59,18.49 0 bottom
U$66  [D75]  34.54,15.75 0 top
U$67  [DAC1]  34.04,31.5 90 bottom
U$68  [MOSI2]  38.46,28.45 0 bottom
U$69  [D21]  34.54,28.45 0 top
U$70  [D166]  55.12,26.92 90 top
U$71  [D177]  55.12,24.38 90 top
U$72  [D16#TX4]  56.46,28.42 0 bottom
U$73  [D17#RX3]  56.46,25.86 0 bottom
U$74  [D85]  56.46,23.62 0 bottom
U$75  [D50]  37.13,20.83 0 bottom
U$76  [D61]  37.13,18.29 0 bottom
U$77  [D72]  37.13,15.77 0 bottom
U$78  [D136]  38.18,13.16 0 top
U$79  [#23]  71.88,27.18 0 bottom
U$80  [#24]  67.18,26.92 0 bottom
U$81  [3#3V10]  81.05,16.46 90 top
U$82  [D33]  60.45,25.91 0 top
U$83  [D41]  60.45,23.37 0 top
U$84  [D52]  60.46,20.07 0 top
U$85  [D65]  60.45,18.29 0 top
U$86  [GND11]  81.05,13.92 90 top
U$87  [OFF13]  69.56,30.02 0 top
U$88  [ON12]  76.59,30.04 0 top
U$89  [PWR16]  75.31,12.97 0 top
U$90  [SCL8]  81.05,21.92 90 top
U$91  [SDA9]  81.05,19.33 90 top
U$92  [RESET0]  73.13,25.02 0 top
U$93  [SCK7]  63.91,23.37 0 bottom
U$94  [MISO0]  64.35,25.86 0 bottom
U$95  [LED1]  78.84,9.79 90 bottom
U$96  [ON12]  78.6,31.05 0 bottom
U$97  [OFF13]  75.48,31.04 0 bottom
U$98  [D00]  82.4,21.03 0 bottom
U$99  [D12]  59.94,31.5 90 top
U$100  [QWIIC2]  75.95,15.24 0 bottom
U$101  [MICRO2]  70.61,15.24 0 bottom
U$102  [SAMD213]  73.91,13.46 0 bottom
U$103  [GND-03]  82.45,15.9 0 bottom
U$104  [3V3-03]  82.5,18.49 0 bottom
U$105  [D75]  60.45,15.75 0 top
U$106  [DAC1]  59.94,31.5 90 bottom
U$107  [MOSI2]  64.36,28.45 0 bottom
U$108  [D21]  60.45,28.45 0 top
U$109  [D166]  81.03,26.92 90 top
U$110  [D177]  81.03,24.38 90 top
U$111  [D16#TX4]  82.37,28.42 0 bottom
U$112  [D17#RX3]  82.37,25.86 0 bottom
U$113  [D85]  82.37,23.62 0 bottom
U$114  [D50]  63.04,20.83 0 bottom
U$115  [D61]  63.04,18.29 0 bottom
U$116  [D72]  63.04,15.77 0 bottom
U$117  [D136]  64.08,13.16 0 top
U$118  [#23]  97.79,27.18 0 bottom
U$119  [#24]  93.09,26.92 0 bottom
U$120  [3#3V10]  106.96,16.46 90 top
U$121  [D33]  86.36,25.91 0 top
U$122  [D41]  86.36,23.37 0 top
U$123  [D52]  86.37,20.07 0 top
U$124  [D65]  86.36,18.29 0 top
U$125  [GND11]  106.96,13.92 90 top
U$126  [OFF13]  95.47,30.02 0 top
U$127  [ON12]  102.5,30.04 0 top
U$128  [PWR16]  101.22,12.97 0 top
U$129  [SCL8]  106.96,21.92 90 top
U$130  [SDA9]  106.96,19.33 90 top
U$131  [RESET0]  99.03,25.02 0 top
U$132  [SCK7]  89.81,23.37 0 bottom
U$133  [MISO0]  90.26,25.86 0 bottom
U$134  [LED1]  104.75,9.79 90 bottom
U$135  [ON12]  104.51,31.05 0 bottom
U$136  [OFF13]  101.38,31.04 0 bottom
U$137  [D00]  108.31,21.03 0 bottom
U$138  [D12]  85.85,31.5 90 top
U$139  [QWIIC2]  101.85,15.24 0 bottom
U$140  [MICRO2]  96.52,15.24 0 bottom
U$141  [SAMD213]  99.82,13.46 0 bottom
U$142  [GND-03]  108.36,15.9 0 bottom
U$143  [3V3-03]  108.41,18.49 0 bottom
U$144  [D75]  86.36,15.75 0 top
U$145  [DAC1]  85.85,31.5 90 bottom
U$146  [MOSI2]  90.27,28.45 0 bottom
U$147  [D21]  86.36,28.45 0 top
U$148  [D166]  106.93,26.92 90 top
U$149  [D177]  106.93,24.38 90 top
U$150  [D16#TX4]  108.28,28.42 0 bottom
U$151  [D17#RX3]  108.28,25.86 0 bottom
U$152  [D85]  108.28,23.62 0 bottom
U$153  [D50]  88.95,20.83 0 bottom
U$154  [D61]  88.95,18.29 0 bottom
U$155  [D72]  88.95,15.77 0 bottom
U$156  [D136]  89.99,13.16 0 top
U$157  [#23]  20.07,55.63 0 bottom
U$158  [#24]  15.37,55.37 0 bottom
U$159  [3#3V10]  29.24,44.91 90 top
U$160  [D33]  8.64,54.36 0 top
U$161  [D41]  8.64,51.82 0 top
U$162  [D52]  8.65,48.51 0 top
U$163  [D65]  8.64,46.74 0 top
U$164  [GND11]  29.24,42.37 90 top
U$165  [OFF13]  17.74,58.47 0 top
U$166  [ON12]  24.78,58.48 0 top
U$167  [PWR16]  23.5,41.41 0 top
U$168  [SCL8]  29.24,50.37 90 top
U$169  [SDA9]  29.24,47.78 90 top
U$170  [RESET0]  21.31,53.47 0 top
U$171  [SCK7]  12.09,51.82 0 bottom
U$172  [MISO0]  12.53,54.31 0 bottom
U$173  [LED1]  27.03,38.24 90 bottom
U$174  [ON12]  26.78,59.5 0 bottom
U$175  [OFF13]  23.66,59.49 0 bottom
U$176  [D00]  30.58,49.48 0 bottom
U$177  [D12]  8.13,59.94 90 top
U$178  [QWIIC2]  24.13,43.69 0 bottom
U$179  [MICRO2]  18.8,43.69 0 bottom
U$180  [SAMD213]  22.1,41.91 0 bottom
U$181  [GND-03]  30.63,44.35 0 bottom
U$182  [3V3-03]  30.68,46.94 0 bottom
U$183  [D75]  8.64,44.2 0 top
U$184  [DAC1]  8.13,59.94 90 bottom
U$185  [MOSI2]  12.55,56.9 0 bottom
U$186  [D21]  8.64,56.9 0 top
U$187  [D166]  29.21,55.37 90 top